# Altium PCB PCB1.PcbDoc (part 1 of 3)
Units mm, origin at the board's own origin, x right, y up, seen from the top; angles counter-clockwise.
Board outline 232.8 x 105.73 mm, 4 copper layers (Top Layer, Power Layer, GND Layer, Bottom Layer), stack 1.714 mm thick; 607 components, 390 nets, 1962 pads, 57 vias.
Unrouted connection lines stored in the file: 1386.
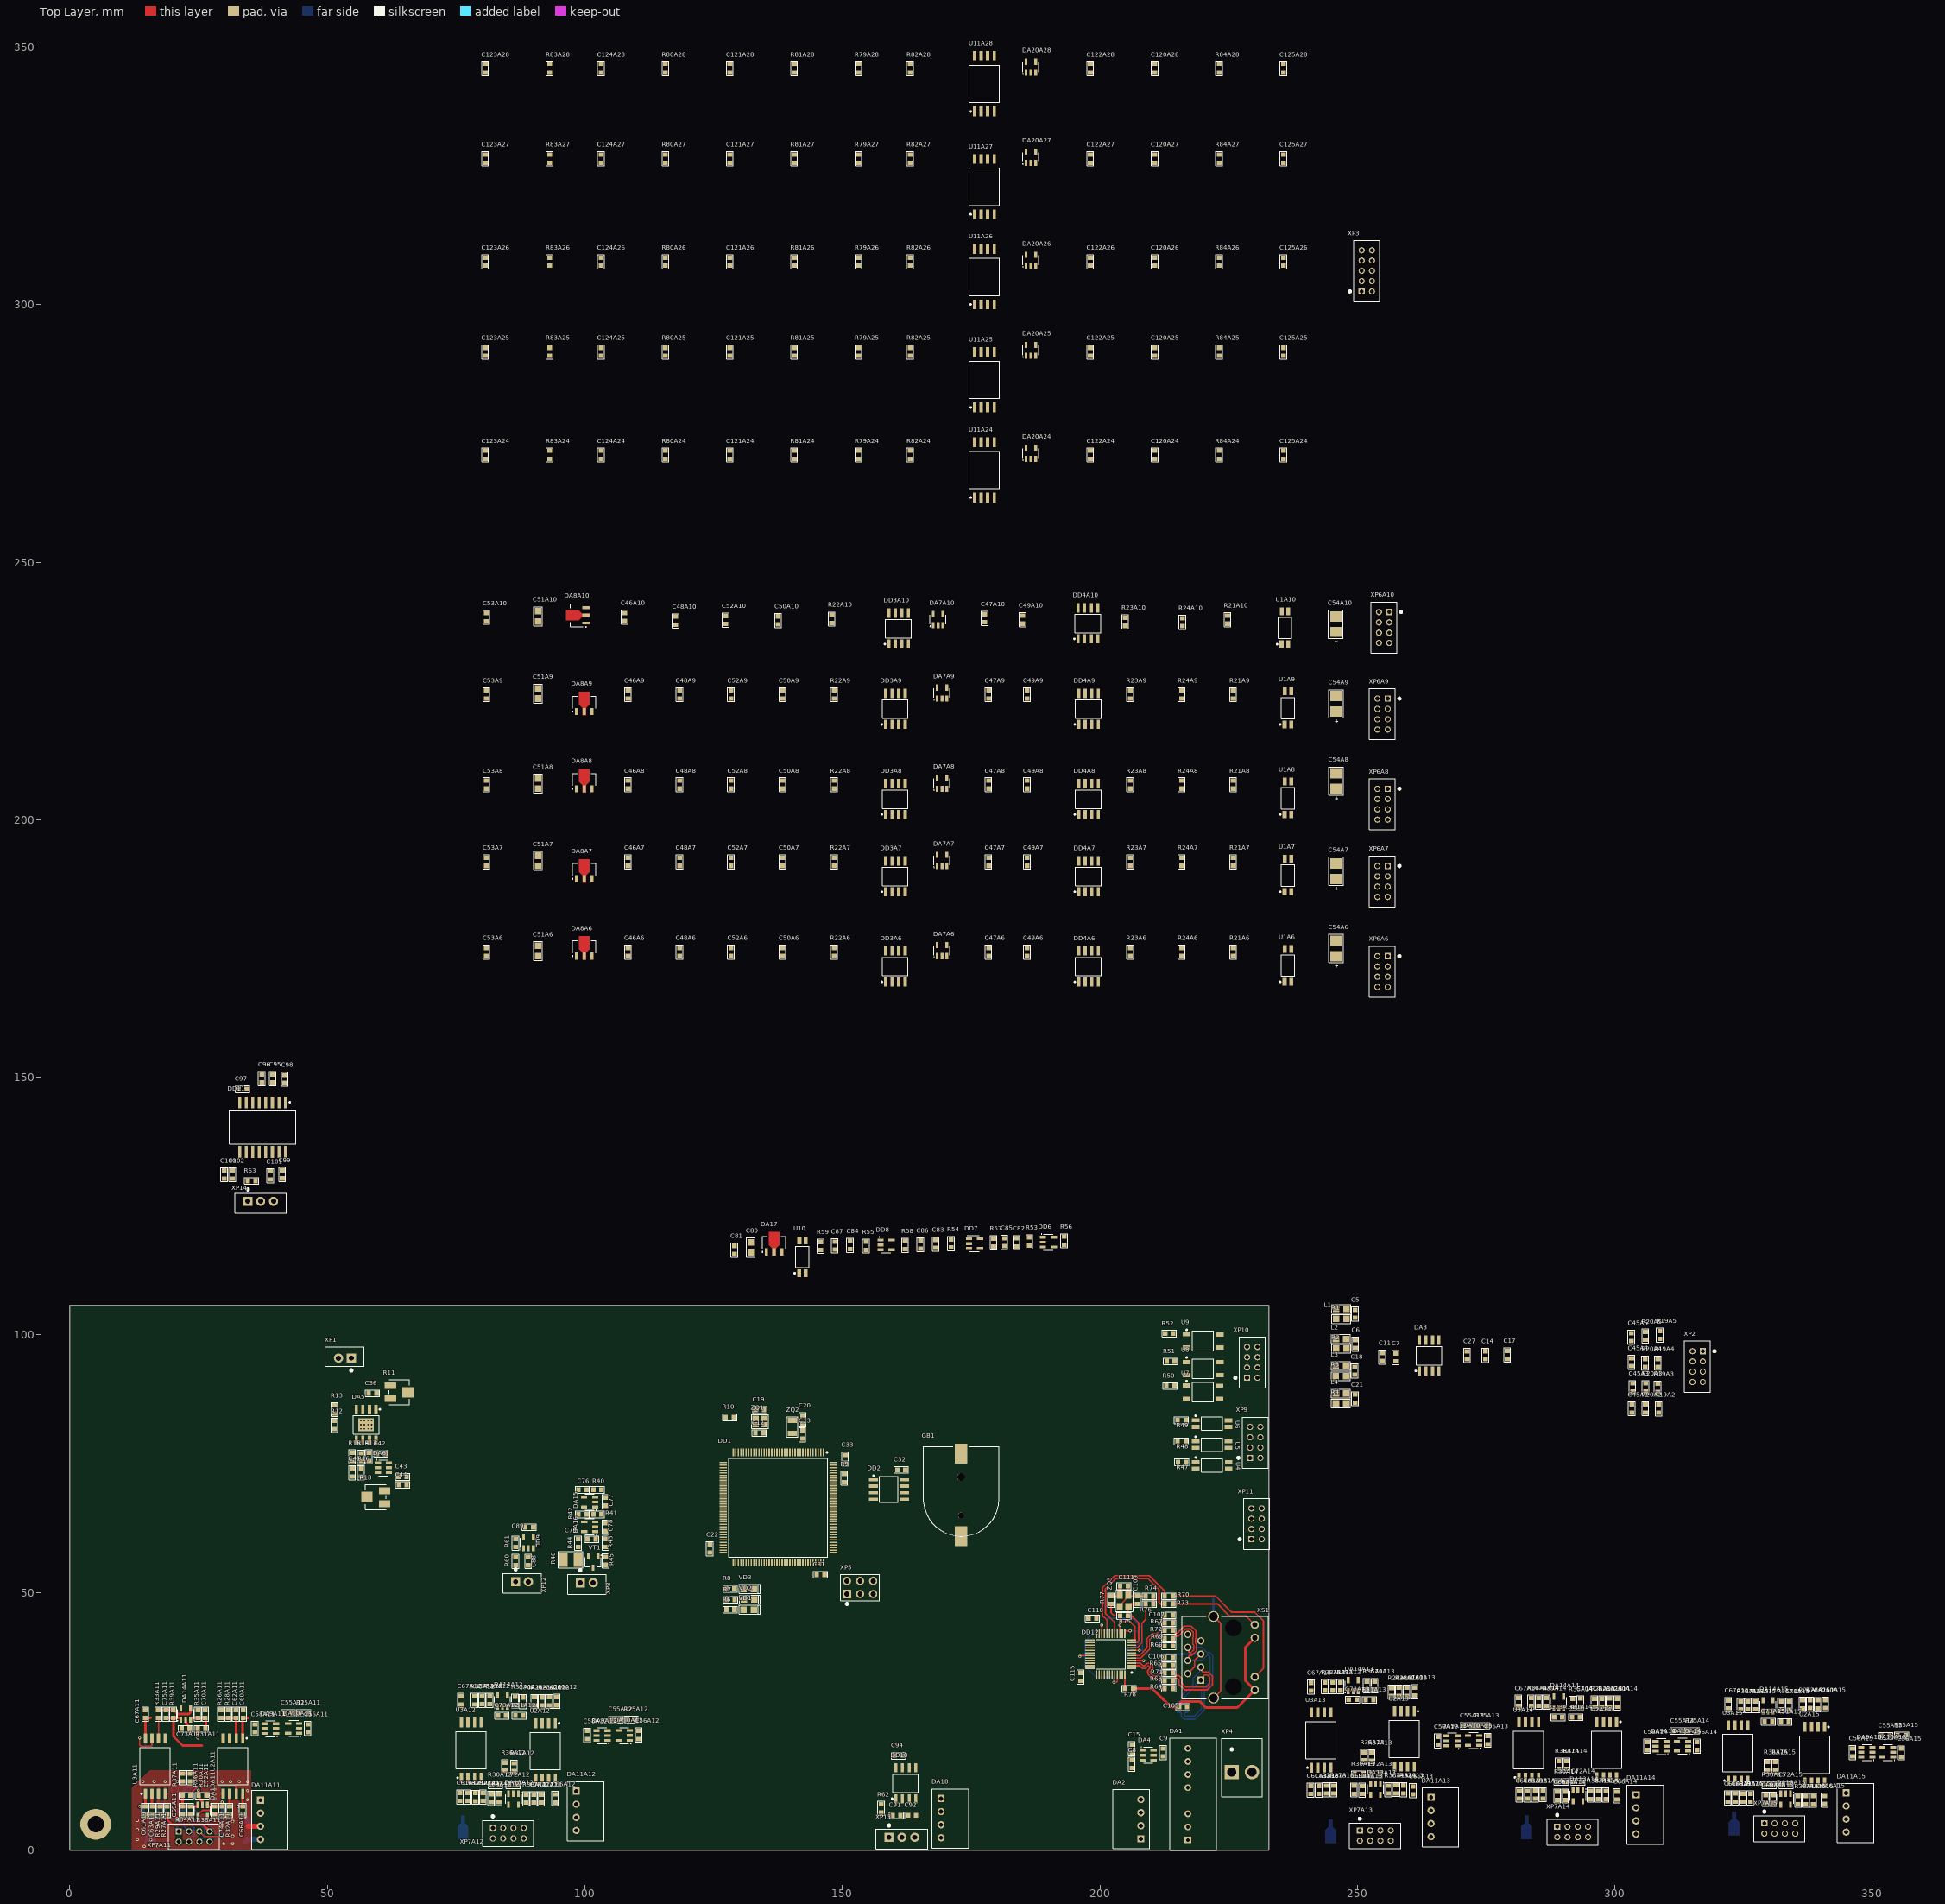
[diagram p0: Top Layer view]
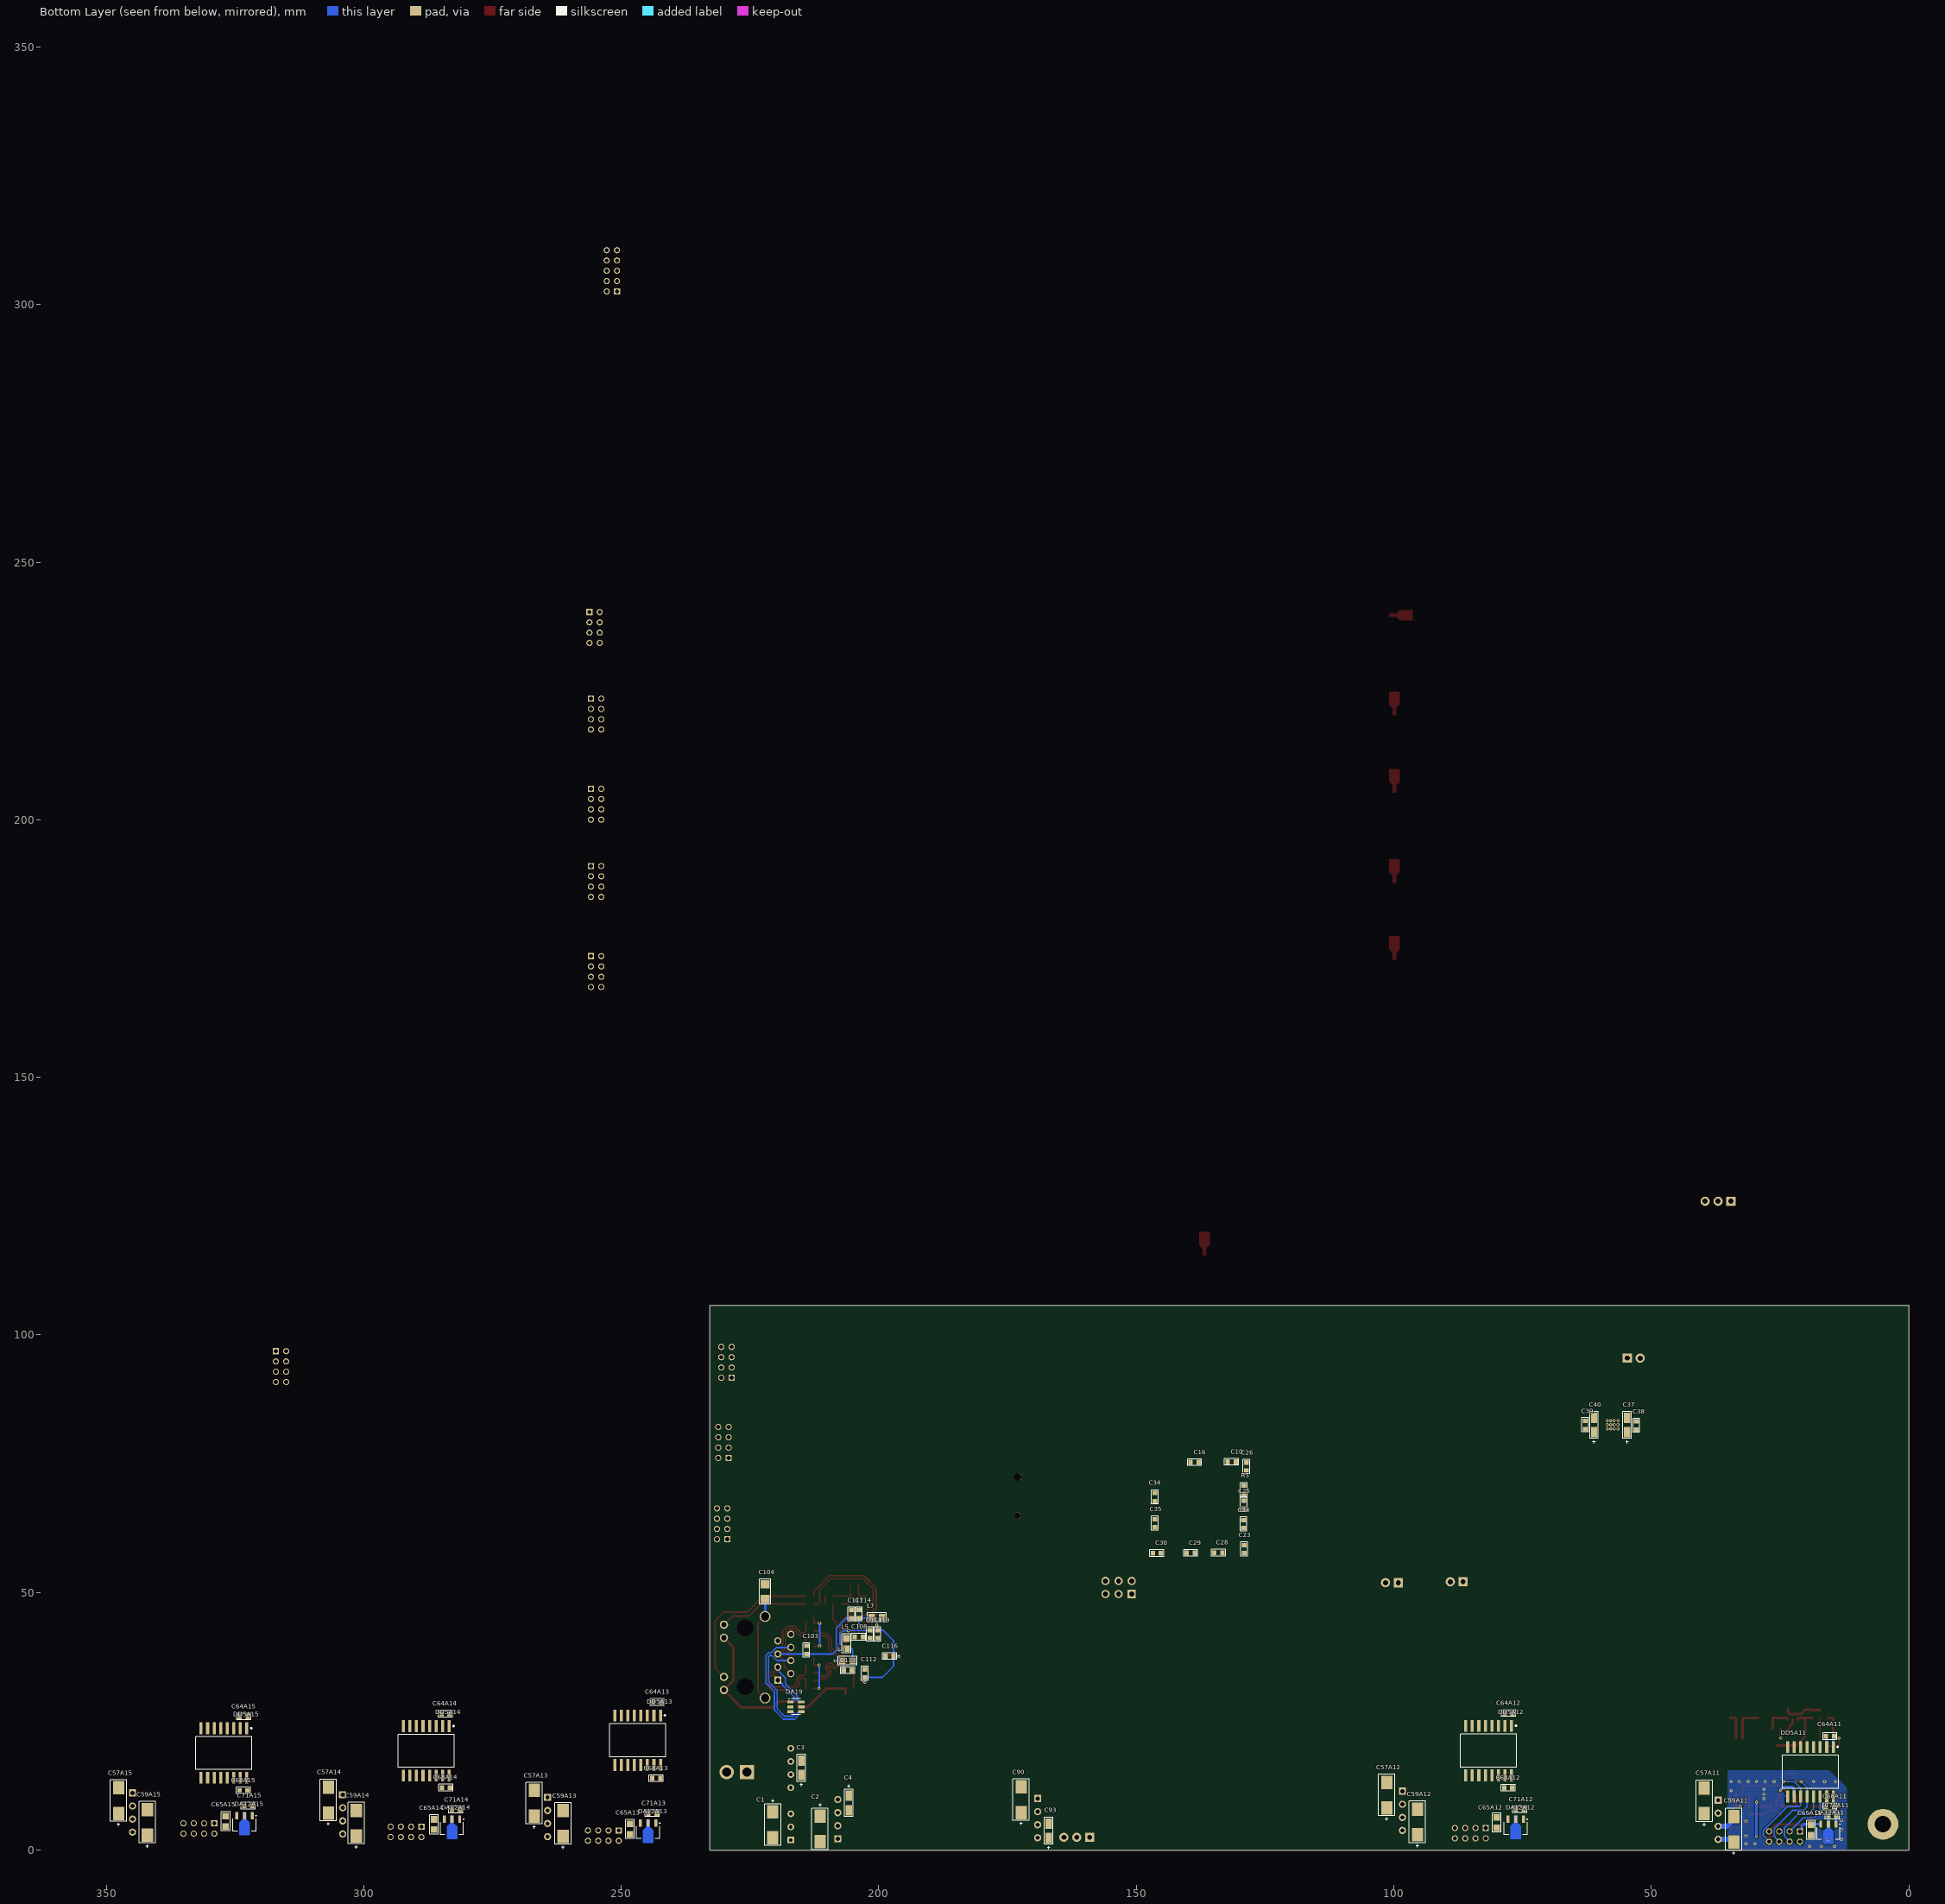
[diagram p1: Bottom Layer view, seen from below]
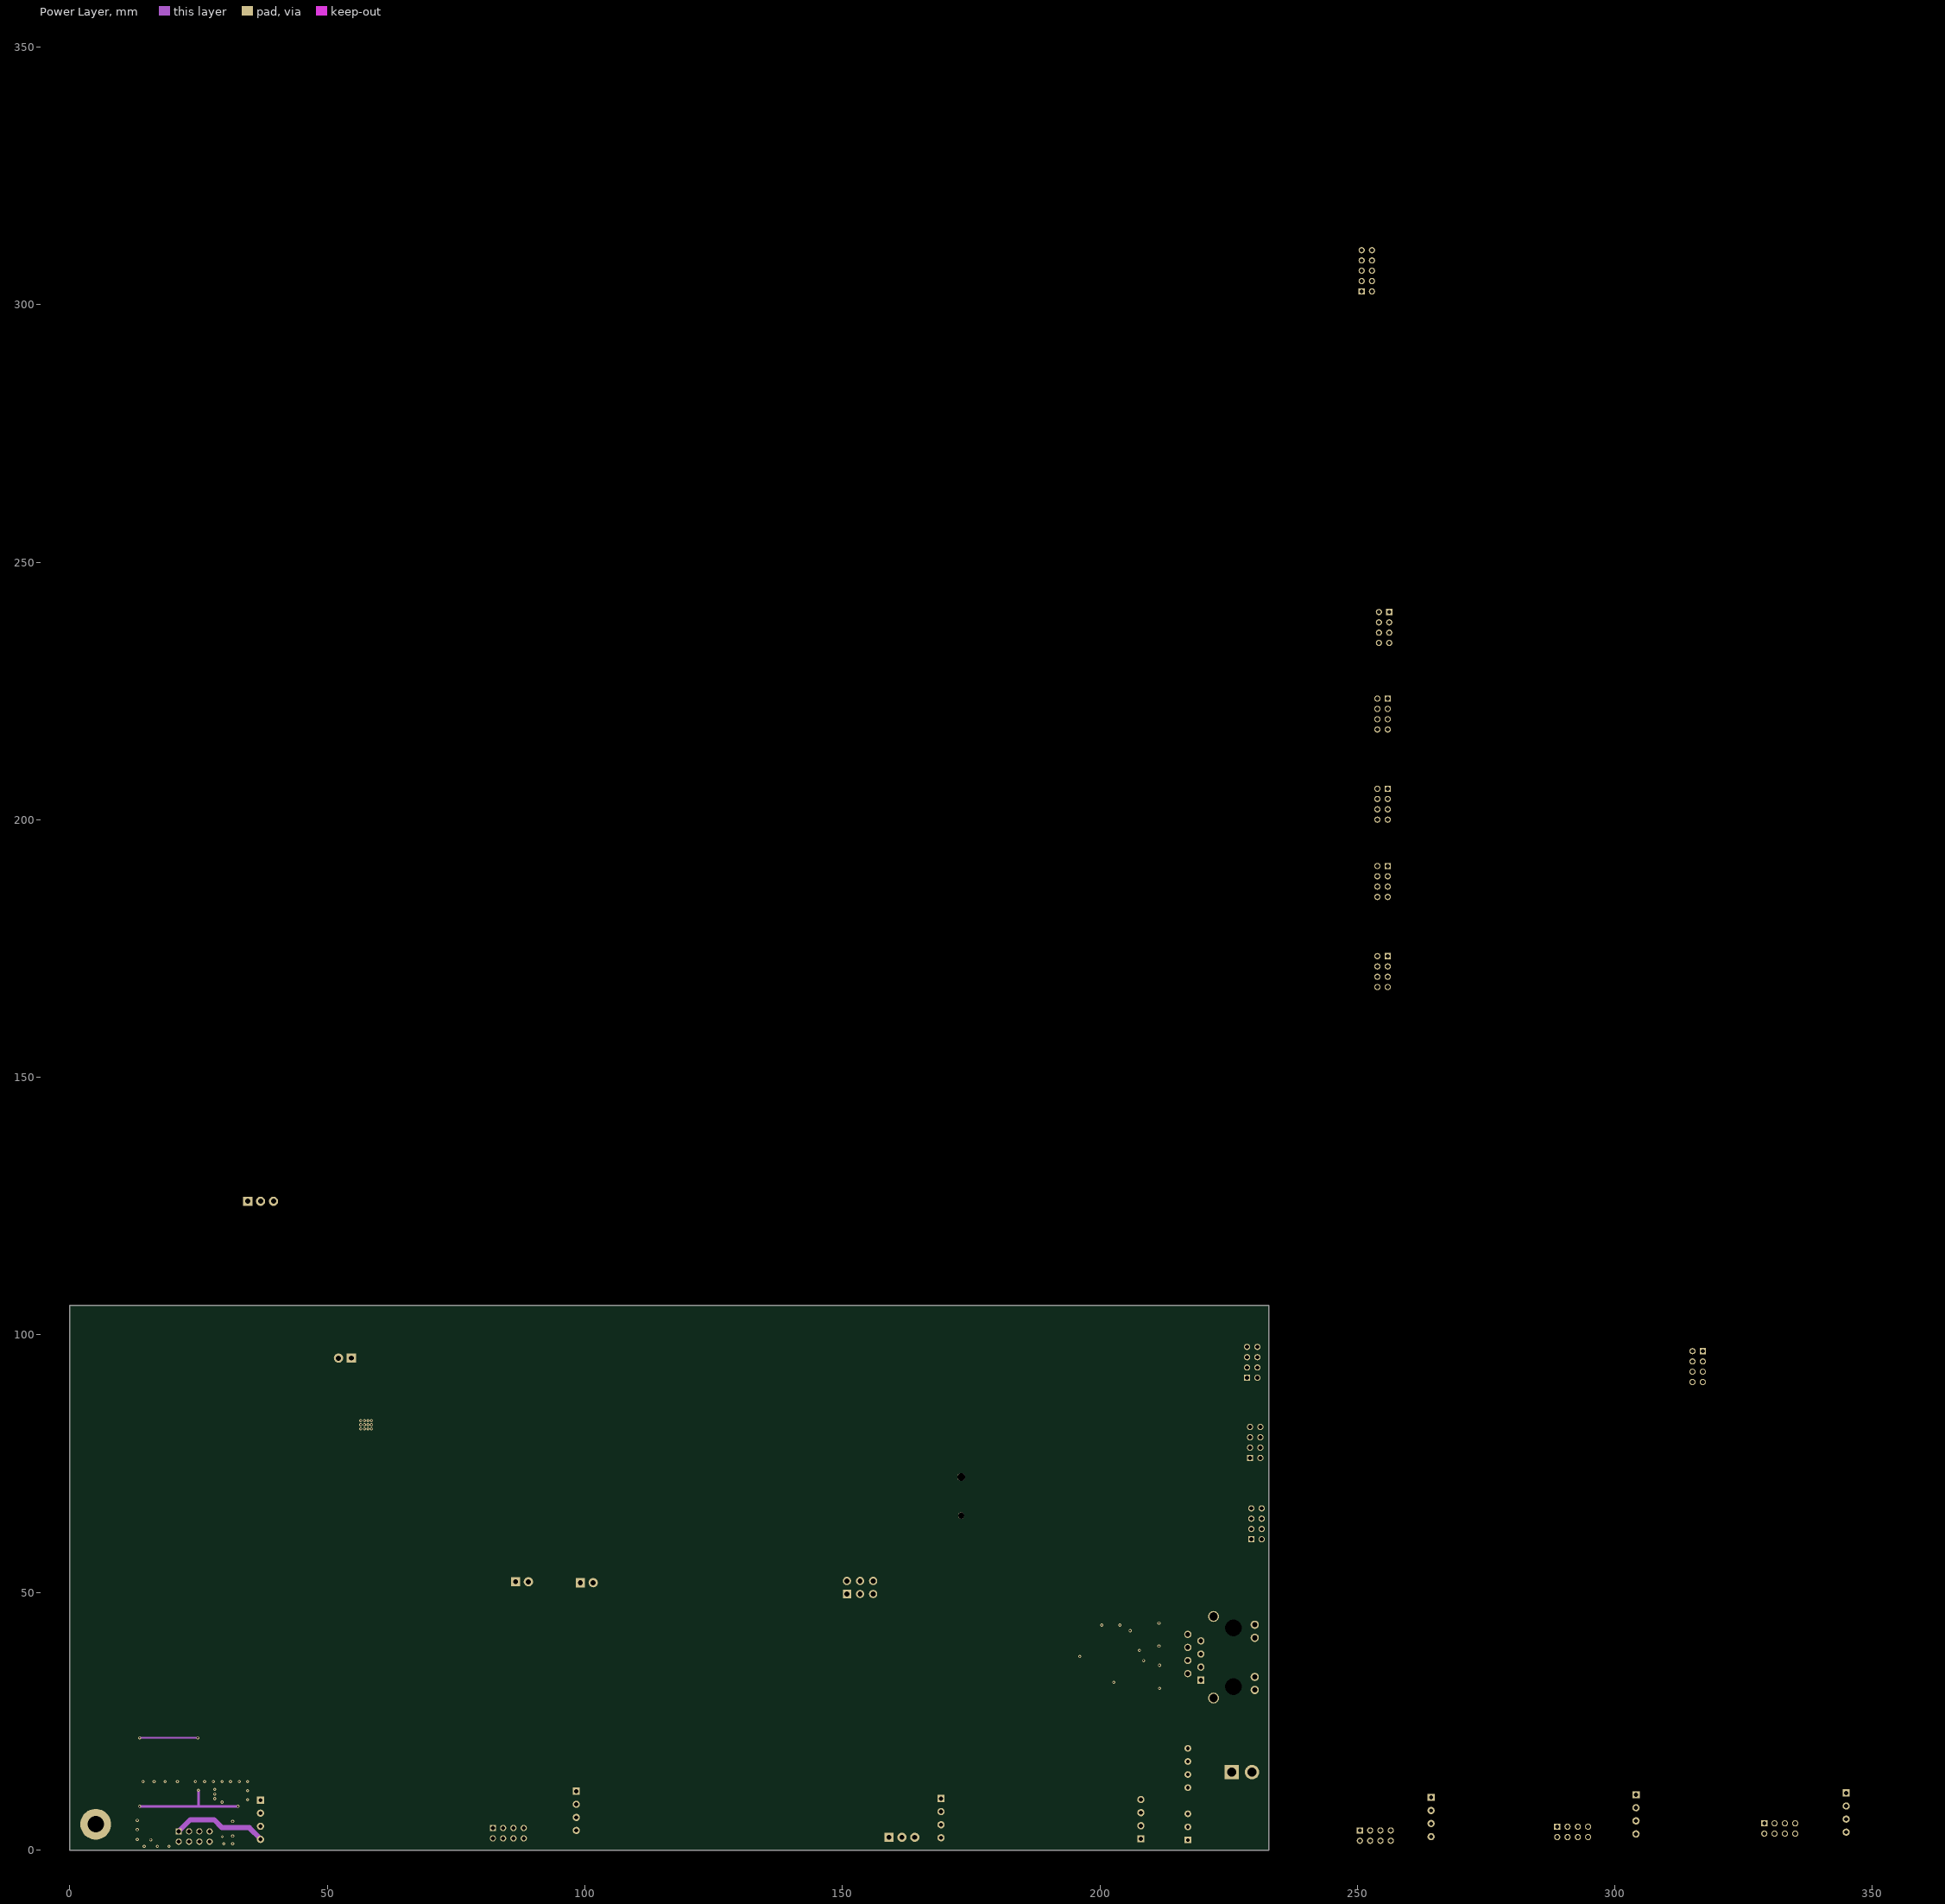
[diagram p2: Power Layer]
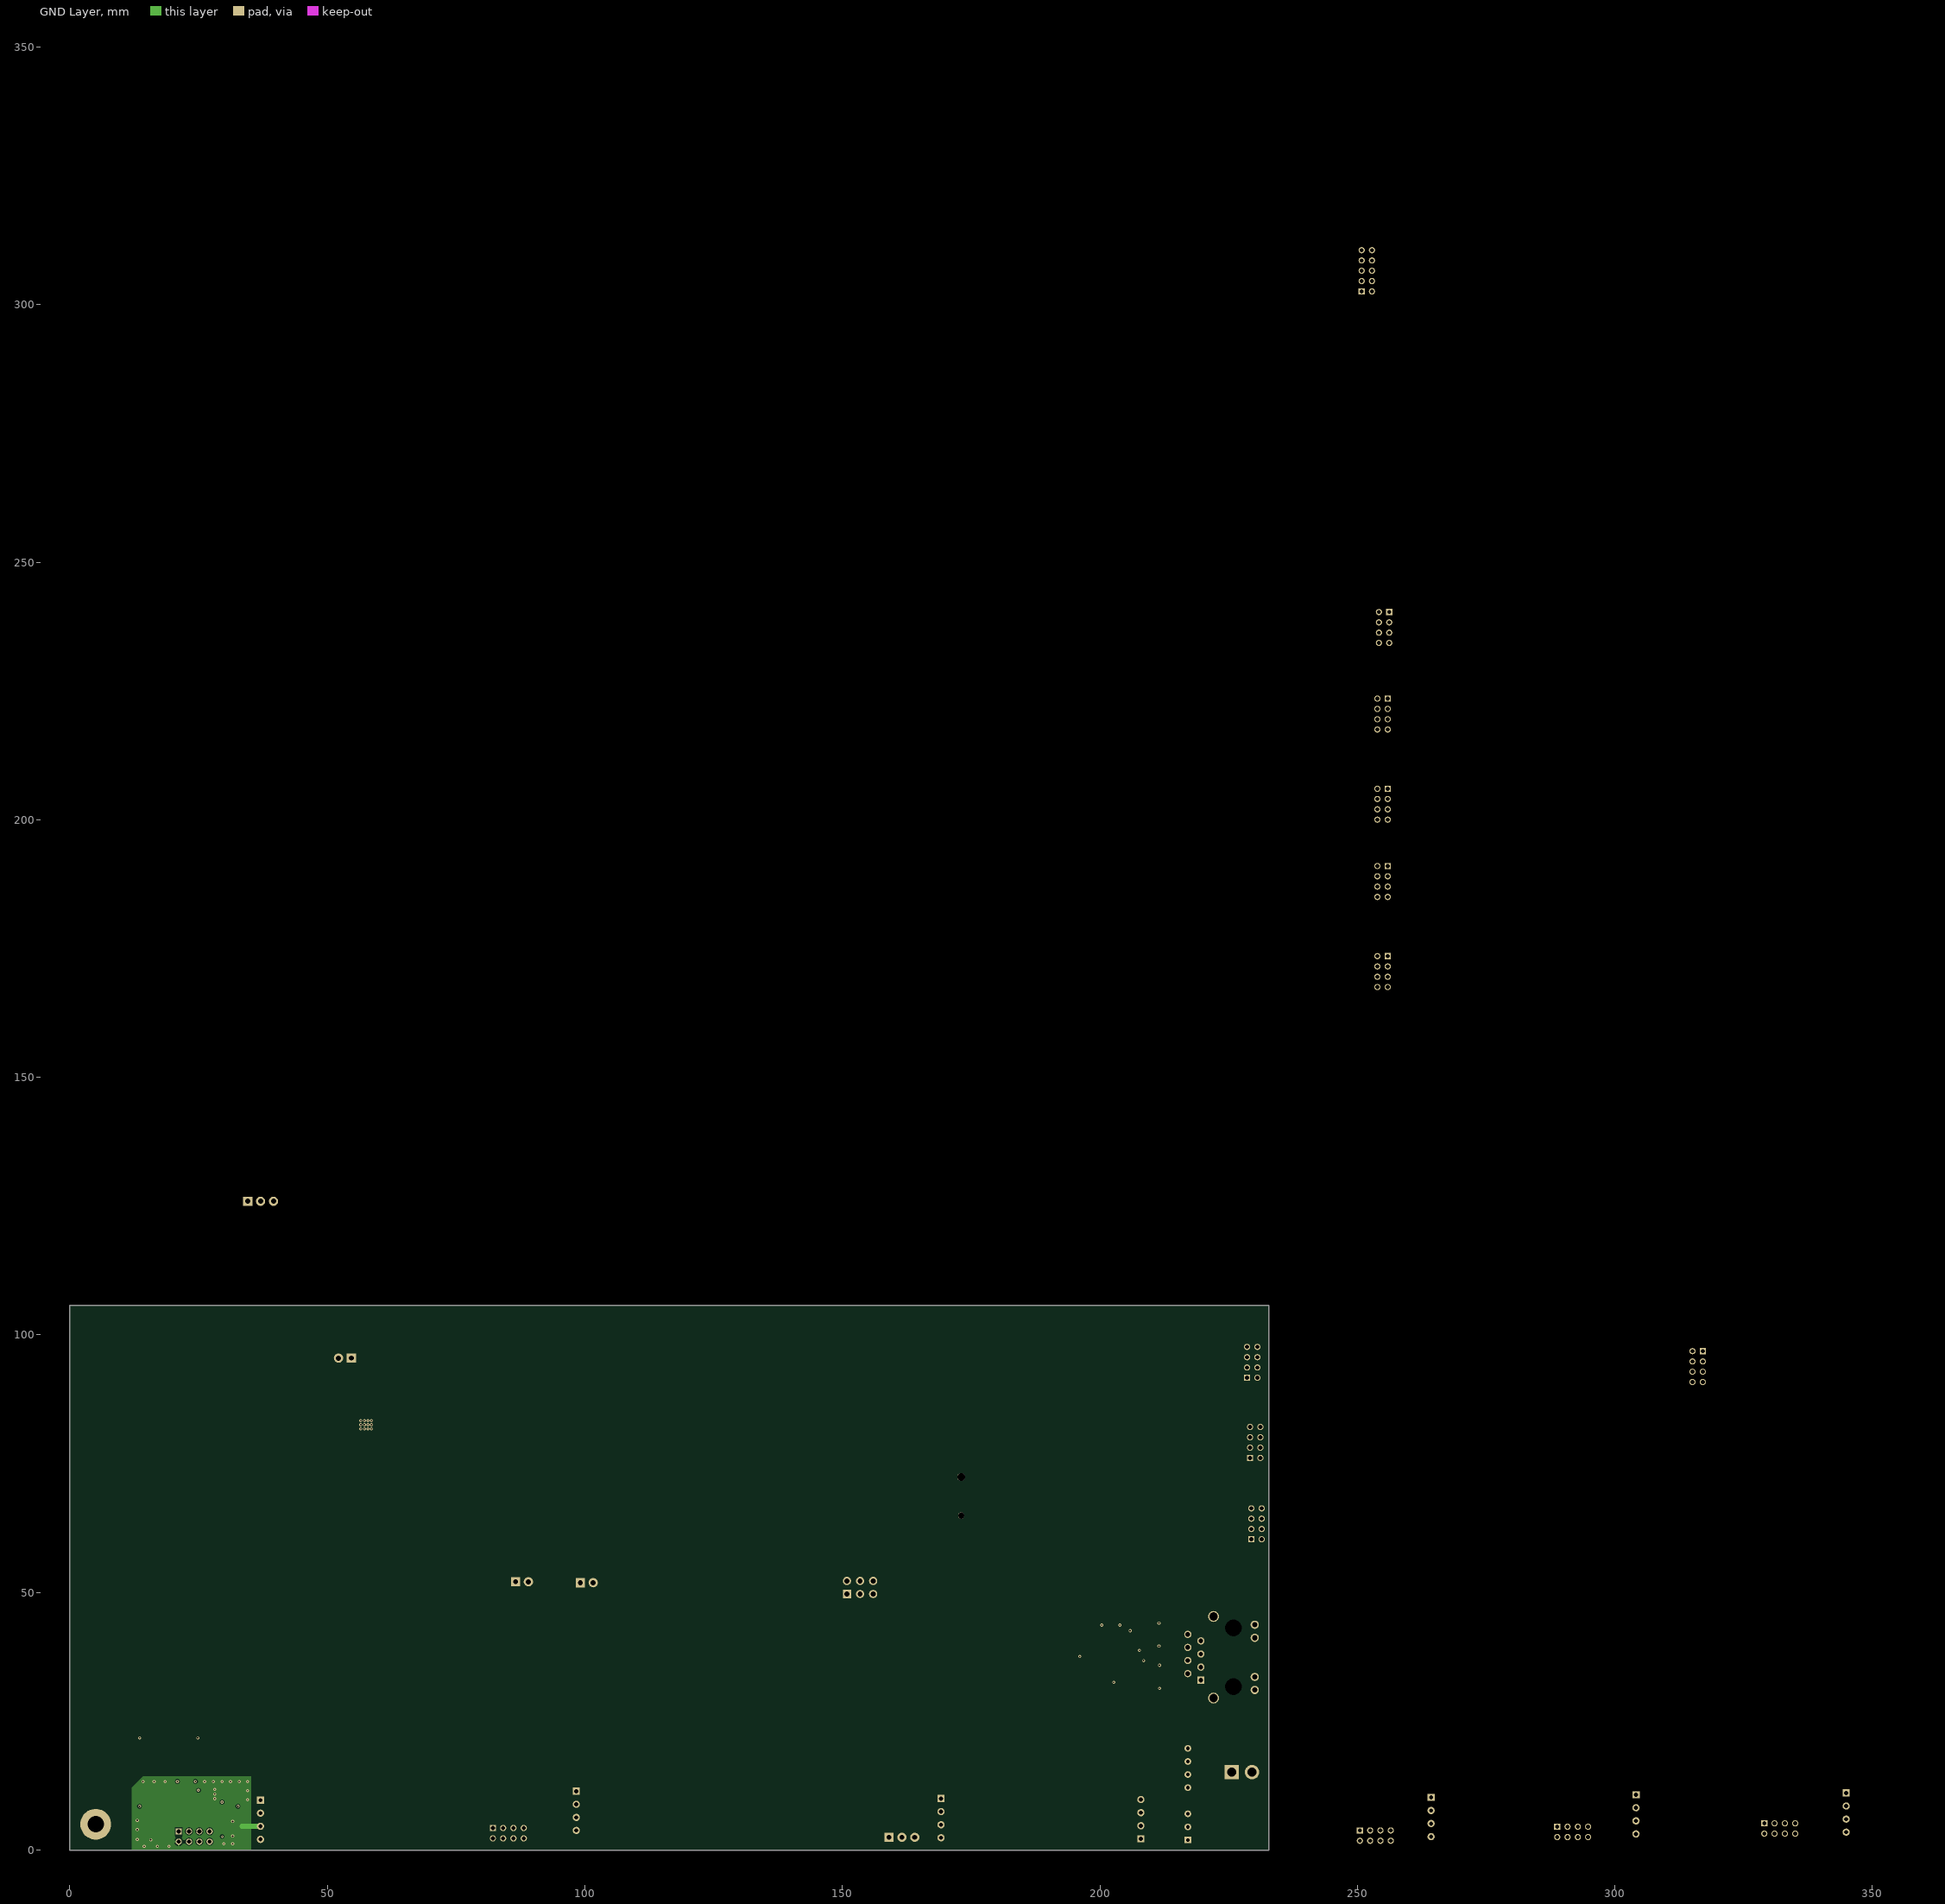
[diagram p3: GND Layer]

## Layer stack, top to bottom
Top Solder: solder mask 0.0102, Solder Resist, Dk 3.5
Top Layer: signal copper 0.018
Dielectric 1: prepreg 0.0711, PP-006, Dk 4.1
Power Layer: signal copper 0.018
Dielectric2: dielectric 1.5, FR-4, Dk 4.8
GND Layer: signal copper 0.018
Dielectric3: prepreg 0.0711, PP-006, Dk 4.1
Bottom Layer: signal copper 0.018
Bottom Solder: solder mask 0.0102, Solder Resist, Dk 3.5

## Board outline
0,0 0,105.725 232.8,105.725 232.8,0

## Design rules (kind name [scope] priority, off if disabled: settings)
BoardOutlineClearance [(OnLayer('Bottom Layer') AND OnLayer('Top Layer'))] p1: gap=0.2 ignorepadtopadclearanceinfootprint=FALSE
Clearance [All] p1: gap=0.15 ignorepadtopadclearanceinfootprint=TRUE
DiffPairsRouting [All] p1: maxlimit=0.254 minlimit=0.2 mostfreqgap=0.254 toplayer_minwidth=0.3 toplayer_maxwidth=0.381 toplayer_prefwidth=0.381 midlayer1_minwidth=0.3 midlayer1_maxwidth=0.381 midlayer1_prefwidth=0.381 midlayer2_minwidth=0.3 midlayer2_maxwidth=0.381 midlayer2_prefwidth=0.381 bottomlayer_minwidth=0.3 bottomlayer_maxwidth=0.381 bottomlayer_prefwidth=0.381 maxuncoupledlength=12.7
Height [(OnLayer('Bottom Layer'))] p1: minheight=0 maxheight=3 prefheight=3
HoleSize [All] p1: absolutevalues=TRUE maxlimit=10 minlimit=0.2 maxpercent=80.000 minpercent=20.000
MinimumSolderMaskSliver [All] p1: minsoldermaskwidth=0.04
PlaneClearance [All] p1: clearance=0.5
PlaneConnect [All] p1: planeconnectstyle=Relief reliefexpansion=0.5 reliefentries=4 reliefconductorwidth=0.25 reliefairgap=0.25
PolygonConnect [All] p1: thpad.connectstyle=Relief thpad.reliefconductorwidth=0.5 thpad.reliefentries=4 thpad.polygonreliefangle="90 Angle" thpad.airgapwidth=0.25 smdpad.connectstyle=Relief smdpad.reliefconductorwidth=0.5 smdpad.reliefentries=4 smdpad.polygonreliefangle="90 Angle" smdpad.airgapwidth=0.25 via.connectstyle=Direct via.reliefconductorwidth=0.254 via.reliefentries=4 via.polygonreliefangle="90 Angle" via.airgapwidth=0.152
RoutingCorners [All] p1: cornerstyle=Round minsetback=0.254 maxsetback=2.54
RoutingVias [All] p1: holewidth=0.2 width=0.5 viastyle="Through Hole" minholewidth=0.2 minwidth=0.5 maxholewidth=1 maxwidth=1
SilkToSilkClearance [All] p1: silktosilkclearance=0.1
SilkToSolderMaskClearance [IsPad] p1: minsilkscreentomaskgap=0 clearancetoexposedcopper=TRUE
SolderMaskExpansion [All] p1: expansion=0.102 istentingtop=FALSE
Width [All] p1: maxlimit=1 minlimit=0.2 preferedwidth=0.3 minimp=50.000000 maximp=50.000000 favimp=50.000000
21 further rules are at their usual default settings.

## Classes and differential pairs
differential pair class TD: TXO
differential pair class RD: RXI
channel class Thermistor: A2 A3 A4 A5
channel class Power_supply: A6 A7 A8 A9 A10
channel class LD_driver: A11 A12 A13 A14 A15
channel class Analog_isolation: A24 A25 A26 A27 A28
component class Main: C1 C2 C3 C4 C5 C6 C7 C8 C9 C10 C11 C12 C13 C14 C15 C16 C17 C18 C19 C20 C21 C22 C23 C24 C25 C26 C27 C28 C29 C30 C31 C32 C33 C34 C35 DA1 DA2 DA3 DA4 DD1 DD2 GB1 L1 L2 L3 L4 R1 R2 R3 R4 R5 R6 R7 R8 R9 R10 VD1 VD2 VD3 XP1 XP2 XP3 XP4 XP5 ZQ1 ZQ2
component class A28: C120A28 C121A28 C122A28 C123A28 C124A28 C125A28 DA20A28 R79A28 R80A28 R81A28 R82A28 R83A28 R84A28 U11A28
component class A27: C120A27 C121A27 C122A27 C123A27 C124A27 C125A27 DA20A27 R79A27 R80A27 R81A27 R82A27 R83A27 R84A27 U11A27
component class A26: C120A26 C121A26 C122A26 C123A26 C124A26 C125A26 DA20A26 R79A26 R80A26 R81A26 R82A26 R83A26 R84A26 U11A26
component class A25: C120A25 C121A25 C122A25 C123A25 C124A25 C125A25 DA20A25 R79A25 R80A25 R81A25 R82A25 R83A25 R84A25 U11A25
component class A24: C120A24 C121A24 C122A24 C123A24 C124A24 C125A24 DA20A24 R79A24 R80A24 R81A24 R82A24 R83A24 R84A24 U11A24
component class A23: C103 C104 C105 C106 C107 C108 C109 C110 C111 C112 C113 C114 C115 C116 C117 C118 C119 DA19 DD12 L5 L6 L7 R64 R65 R66 R67 R68 R69 R70 R71 R72 R73 R74 R75 R76 R77 R78 XS1 ZQ3
component class A22: C95 C96 C97 C98 C99 C100 C101 C102 DD11 R63 XP14
component class A21: C90 C91 C92 C93 C94 DA18 DD10 R62 XP13
component class A20: C88 C89 DD9 R60 R61 XP12
component class A19: C80 C81 C82 C83 C84 C85 C86 C87 DA17 DD6 DD7 DD8 R53 R54 R55 R56 R57 R58 R59 U10 XP11
component class A18: R50 R51 R52 U7 U8 U9 XP10
component class A17: R47 R48 R49 U4 U5 U6 XP9
component class A16: C76 C77 C78 C79 DA15 DA16 R40 R41 R42 R43 R44 R45 R46 VT1 XP8
component class A15: C55A15 C56A15 C57A15 C58A15 C59A15 C60A15 C61A15 C62A15 C63A15 C64A15 C65A15 C66A15 C67A15 C68A15 C69A15 C70A15 C71A15 C72A15 C73A15 C74A15 C75A15 DA9A15 DA10A15 DA11A15 DA12A15 DA13A15 DA14A15 DD5A15 R25A15 R26A15 R27A15 R28A15 R29A15 R30A15 R31A15 R32A15 R33A15 R34A15 R35A15 R36A15 R37A15 R38A15 R39A15 U2A15 U3A15 XP7A15
component class A14: C55A14 C56A14 C57A14 C58A14 C59A14 C60A14 C61A14 C62A14 C63A14 C64A14 C65A14 C66A14 C67A14 C68A14 C69A14 C70A14 C71A14 C72A14 C73A14 C74A14 C75A14 DA9A14 DA10A14 DA11A14 DA12A14 DA13A14 DA14A14 DD5A14 R25A14 R26A14 R27A14 R28A14 R29A14 R30A14 R31A14 R32A14 R33A14 R34A14 R35A14 R36A14 R37A14 R38A14 R39A14 U2A14 U3A14 XP7A14
component class A13: C55A13 C56A13 C57A13 C58A13 C59A13 C60A13 C61A13 C62A13 C63A13 C64A13 C65A13 C66A13 C67A13 C68A13 C69A13 C70A13 C71A13 C72A13 C73A13 C74A13 C75A13 DA9A13 DA10A13 DA11A13 DA12A13 DA13A13 DA14A13 DD5A13 R25A13 R26A13 R27A13 R28A13 R29A13 R30A13 R31A13 R32A13 R33A13 R34A13 R35A13 R36A13 R37A13 R38A13 R39A13 U2A13 U3A13 XP7A13
component class A12: C55A12 C56A12 C57A12 C58A12 C59A12 C60A12 C61A12 C62A12 C63A12 C64A12 C65A12 C66A12 C67A12 C68A12 C69A12 C70A12 C71A12 C72A12 C73A12 C74A12 C75A12 DA9A12 DA10A12 DA11A12 DA12A12 DA13A12 DA14A12 DD5A12 R25A12 R26A12 R27A12 R28A12 R29A12 R30A12 R31A12 R32A12 R33A12 R34A12 R35A12 R36A12 R37A12 R38A12 R39A12 U2A12 U3A12 XP7A12
component class A11: C55A11 C56A11 C57A11 C58A11 C59A11 C60A11 C61A11 C62A11 C63A11 C64A11 C65A11 C66A11 C67A11 C68A11 C69A11 C70A11 C71A11 C72A11 C73A11 C74A11 C75A11 DA9A11 DA10A11 DA11A11 DA12A11 DA13A11 DA14A11 DD5A11 R25A11 R26A11 R27A11 R28A11 R29A11 R30A11 R31A11 R32A11 R33A11 R34A11 R35A11 R36A11 R37A11 R38A11 R39A11 U2A11 U3A11 XP7A11
component class A10: C46A10 C47A10 C48A10 C49A10 C50A10 C51A10 C52A10 C53A10 C54A10 DA7A10 DA8A10 DD3A10 DD4A10 R21A10 R22A10 R23A10 R24A10 U1A10 XP6A10
component class A9: C46A9 C47A9 C48A9 C49A9 C50A9 C51A9 C52A9 C53A9 C54A9 DA7A9 DA8A9 DD3A9 DD4A9 R21A9 R22A9 R23A9 R24A9 U1A9 XP6A9
component class A8: C46A8 C47A8 C48A8 C49A8 C50A8 C51A8 C52A8 C53A8 C54A8 DA7A8 DA8A8 DD3A8 DD4A8 R21A8 R22A8 R23A8 R24A8 U1A8 XP6A8
component class A7: C46A7 C47A7 C48A7 C49A7 C50A7 C51A7 C52A7 C53A7 C54A7 DA7A7 DA8A7 DD3A7 DD4A7 R21A7 R22A7 R23A7 R24A7 U1A7 XP6A7
component class A6: C46A6 C47A6 C48A6 C49A6 C50A6 C51A6 C52A6 C53A6 C54A6 DA7A6 DA8A6 DD3A6 DD4A6 R21A6 R22A6 R23A6 R24A6 U1A6 XP6A6
component class A5: C45A5 R19A5 R20A5
component class A4: C45A4 R19A4 R20A4
component class A3: C45A3 R19A3 R20A3
component class A2: C45A2 R19A2 R20A2
component class A1: C36 C37 C38 C39 C40 C41 C42 C43 C44 DA5 DA6 R11 R12 R13 R14 R15 R16 R17 R18
differential pair TXO: +TXO_P -TXO_N
differential pair TD: +TD_P -TD_N
differential pair RXI: +RXI_P -RXI_N
differential pair RD: +RD_P -RD_N

## Components (designator, comment, footprint, x,y, rotation, side; value= is the part's Value field where it differs from the comment)
C1 "10мкФх35B" CAP_C 220.6,7.425 r270 bottom
C2 "10мкФх35B" CAP_C 211.4,6.6 r270 bottom
C3 "10мкФх10B" CAP_A 215.025,14.55 r90 bottom
C4 "10мкФх10B" CAP_A 205.8,10.525 r270 bottom
C5 "0,1мкФ" CAP_0603 249.575,104.9 r270 top
C6 "0,1мкФ" CAP_0603 249.6,99.025 r270 top
C7 "0,1мкФ" CAP_0603 257.425,94.825 r90 top
C8 "10мкФ" CAP_0603 206.2,15.875 r90 top
C9 "1мкФ" CAP_0603 212.275,18.15 r90 top
C10 "0,1мкФ" CAP_0603 132.275,75.35 r180 bottom
C11 "10мкФ" CAP_0603 254.85,96.5 r270 top
C12 "8пФ" CAP_0603 133.075,80.975 r0 top
C13 "18пФ" CAP_0603 142.25,79.85 r90 top
C14 "0,1мкФ" CAP_0603 274.875,95.275 r90 top
C15 "10мкФ" CAP_0603 206.2,20.475 r270 top
C16 "0,1мкФ" CAP_0603 139.475,75.275 r180 bottom
C17 "0,1мкФ" CAP_0603 279.1,95.3 r90 top
C18 "0,1мкФ" CAP_0603 249.475,93.825 r270 top
C19 "8пФ" CAP_0603 134.8,85.45 r180 top
C20 "18пФ" CAP_0603 142.275,84.375 r270 top
C21 "0,1мкФ" CAP_0603 249.575,88.425 r270 top
C22 "2,2мкФ" CAP_0603 124.275,59.325 r270 top
C23 "0,1мкФ" CAP_0603 129.05,59.225 r270 bottom
C24 "0,1мкФ" CAP_0603 129.15,62.475 r90 bottom
C25 "0,1мкФ" CAP_0603 129.125,66.225 r90 bottom
C26 "0,1мкФ" CAP_0603 128.6,73.65 r90 bottom
C27 "0,1мкФ" CAP_0603 271.3,95.25 r90 top
C28 "0,1мкФ" CAP_0603 133.25,57.7 r0 bottom
C29 "0,1мкФ" CAP_0603 138.625,57.675 r0 bottom
C30 "0,1мкФ" CAP_0603 145.2,57.625 r0 bottom
C31 "2,2мкФ" CAP_0603 144.975,53.475 r0 top
C32 "0,1мкФ" CAP_0603 162.25,73.825 r180 top
C33 "0,1мкФ" CAP_0603 150.525,75.125 r90 top
C34 "0,1мкФ" CAP_0603 146.4,69.325 r270 bottom
C35 "0,1мкФ" CAP_0603 146.375,64.25 r270 bottom
C36 "22пФ" CAP_0603 59.575,88.675 r180 top
C37 "10мкФх10B" CAP_A 54.686,81.1 r90 bottom
C38 "0,1мкФ" CAP_0603 52.9,83.225 r270 bottom
C39 "0,1мкФ" CAP_0603 62.825,81.725 r90 bottom
C40 "10мкФх10B" CAP_A 61.111,81.1 r90 bottom
C41 "0,1мкФ" CAP_0603 54.825,72.475 r90 top
C42 "22пФ" CAP_0603 59.65,76.95 r0 top
C43 "0,1мкФ" CAP_0603 63.8,72.45 r0 top
C44 "2,2мкФ" CAP_0603 63.825,70.9 r0 top
C45A2 "0,1мкФ" CAP_0603 303.275,84.9 r90 top (schematic designator C45)
C45A3 "0,1мкФ" CAP_0603 303.425,89 r90 top (schematic designator C45)
C45A4 "0,1мкФ" CAP_0603 303.225,93.9 r90 top (schematic designator C45)
C45A5 "0,1мкФ" CAP_0603 303.2,98.775 r90 top (schematic designator C45)
C46A6 "0,1мкФ" CAP_0603 108.375,173.525 r90 top (schematic designator C46)
C46A7 "0,1мкФ" CAP_0603 108.375,191.025 r90 top (schematic designator C46)
C46A8 "0,1мкФ" CAP_0603 108.375,206.025 r90 top (schematic designator C46)
C46A9 "0,1мкФ" CAP_0603 108.375,223.525 r90 top (schematic designator C46)
C46A10 "0,1мкФ" CAP_0603 107.75,238.55 r90 top (schematic designator C46)
C47A6 "0,1мкФ" CAP_0603 178.375,173.525 r90 top (schematic designator C47)
C47A7 "0,1мкФ" CAP_0603 178.375,191.025 r90 top (schematic designator C47)
C47A8 "0,1мкФ" CAP_0603 178.375,206.025 r90 top (schematic designator C47)
C47A9 "0,1мкФ" CAP_0603 178.375,223.525 r90 top (schematic designator C47)
C47A10 "0,1мкФ" CAP_0603 177.625,238.325 r90 top (schematic designator C47)
C48A6 "0,1мкФ" CAP_0603 118.375,173.525 r90 top (schematic designator C48)
C48A7 "0,1мкФ" CAP_0603 118.375,191.025 r90 top (schematic designator C48)
C48A8 "0,1мкФ" CAP_0603 118.375,206.025 r90 top (schematic designator C48)
C48A9 "0,1мкФ" CAP_0603 118.375,223.525 r90 top (schematic designator C48)
C48A10 "0,1мкФ" CAP_0603 117.65,237.85 r90 top (schematic designator C48)
C49A6 "0,1мкФ" CAP_0603 185.875,173.525 r90 top (schematic designator C49)
C49A7 "0,1мкФ" CAP_0603 185.875,191.025 r90 top (schematic designator C49)
C49A8 "0,1мкФ" CAP_0603 185.875,206.025 r90 top (schematic designator C49)
C49A9 "0,1мкФ" CAP_0603 185.875,223.525 r90 top (schematic designator C49)
C49A10 "0,1мкФ" CAP_0603 185,238.05 r90 top (schematic designator C49)
C50A6 "1мкФ" CAP_0603 138.375,173.525 r90 top (schematic designator C50)
C50A7 "1мкФ" CAP_0603 138.375,191.025 r90 top (schematic designator C50)
C50A8 "1мкФ" CAP_0603 138.375,206.025 r90 top (schematic designator C50)
C50A9 "1мкФ" CAP_0603 138.375,223.525 r90 top (schematic designator C50)
C50A10 "1мкФ" CAP_0603 137.525,237.925 r90 top (schematic designator C50)
C51A6 "0,33мкФ" CAP_0805 90.875,173.525 r90 top (schematic designator C51)
C51A7 "0,33мкФ" CAP_0805 90.875,191.025 r90 top (schematic designator C51)
C51A8 "0,33мкФ" CAP_0805 90.875,206.025 r90 top (schematic designator C51)
C51A9 "0,33мкФ" CAP_0805 90.875,223.525 r90 top (schematic designator C51)
C51A10 "0,33мкФ" CAP_0805 90.875,238.525 r90 top (schematic designator C51)
C52A6 "0,1мкФ" CAP_0603 128.375,173.525 r90 top (schematic designator C52)
C52A7 "0,1мкФ" CAP_0603 128.375,191.025 r90 top (schematic designator C52)
C52A8 "0,1мкФ" CAP_0603 128.375,206.025 r90 top (schematic designator C52)
C52A9 "0,1мкФ" CAP_0603 128.375,223.525 r90 top (schematic designator C52)
C52A10 "0,1мкФ" CAP_0603 127.35,237.975 r90 top (schematic designator C52)
C53A6 "0,1мкФ" CAP_0603 80.875,173.525 r90 top (schematic designator C53)
C53A7 "0,1мкФ" CAP_0603 80.875,191.025 r90 top (schematic designator C53)
C53A8 "0,1мкФ" CAP_0603 80.875,206.025 r90 top (schematic designator C53)
C53A9 "0,1мкФ" CAP_0603 80.875,223.525 r90 top (schematic designator C53)
C53A10 "0,1мкФ" CAP_0603 80.875,238.525 r90 top (schematic designator C53)
C54A6 "10мкФх25B" CAP_B 245.875,173.525 r90 top (schematic designator C54)
C54A7 "10мкФх25B" CAP_B 245.875,188.525 r90 top (schematic designator C54)
C54A8 "10мкФх25B" CAP_B 245.875,206.025 r90 top (schematic designator C54)
C54A9 "10мкФх25B" CAP_B 245.875,221.025 r90 top (schematic designator C54)
C54A10 "10мкФх25B" CAP_B 245.8,236.475 r90 top (schematic designator C54)
C55A11 "10нФ" CAP_0603 43.2,26.6 r180 top (schematic designator C55)
C55A12 "10нФ" CAP_0603 106.825,25.325 r180 top (schematic designator C55)
C55A13 "10нФ" CAP_0603 272.2,24.15 r180 top (schematic designator C55)
C55A14 "10нФ" CAP_0603 312.975,23.125 r180 top (schematic designator C55)
C55A15 "10нФ" CAP_0603 353.375,22.175 r180 top (schematic designator C55)
C56A11 "0,1мкФ" CAP_0603 46.2,24.45 r270 top (schematic designator C56)
C56A12 "0,1мкФ" CAP_0603 110.475,23.15 r270 top (schematic designator C56)
C56A13 "0,1мкФ" CAP_0603 275.325,22.125 r270 top (schematic designator C56)
C56A14 "0,1мкФ" CAP_0603 315.95,20.975 r270 top (schematic designator C56)
C56A15 "0,1мкФ" CAP_0603 355.6,19.7 r270 top (schematic designator C56)
C57A11 "10мкФх35B" CAP_C 39.7,7.05 r90 bottom (schematic designator C57)
C57A12 "10мкФх35B" CAP_C 101.35,8.15 r90 bottom (schematic designator C57)
C57A13 "10мкФх35B" CAP_C 266.875,6.575 r90 bottom (schematic designator C57)
C57A14 "10мкФх35B" CAP_C 306.865,7.2 r90 bottom (schematic designator C57)
C57A15 "10мкФх35B" CAP_C 347.6,7.075 r90 bottom (schematic designator C57)
C58A11 "0,1мкФ" CAP_0603 35.925,24.425 r270 top (schematic designator C58)
C58A12 "0,1мкФ" CAP_0603 100.45,23.125 r270 top (schematic designator C58)
C58A13 "0,1мкФ" CAP_0603 265.625,22.025 r270 top (schematic designator C58)
C58A14 "0,1мкФ" CAP_0603 306.25,20.975 r270 top (schematic designator C58)
C58A15 "0,1мкФ" CAP_0603 346.15,19.75 r270 top (schematic designator C58)
C59A11 "10мкФх25B" CAP_C 33.975,1.525 r90 bottom (schematic designator C59)
C59A12 "10мкФх25B" CAP_C 95.375,2.95 r90 bottom (schematic designator C59)
C59A13 "10мкФх25B" CAP_C 261.3,2.65 r90 bottom (schematic designator C59)
C59A14 "10мкФх25B" CAP_C 301.44,2.7 r90 bottom (schematic designator C59)
C59A15 "10мкФх25B" CAP_C 342,2.875 r90 bottom (schematic designator C59)
C60A11 "0,1мкФ" CAP_0603 33.675,25.625 r90 top (schematic designator C60)
C60A12 "0,1мкФ" CAP_0603 94.55,28.1 r90 top (schematic designator C60)
C60A13 "0,1мкФ" CAP_0603 261.15,29.95 r90 top (schematic designator C60)
C60A14 "0,1мкФ" CAP_0603 300.475,27.8 r90 top (schematic designator C60)
C60A15 "0,1мкФ" CAP_0603 340.875,27.525 r90 top (schematic designator C60)
C61A11 "0,1мкФ" CAP_0603 14.575,8.5 r270 top (schematic designator C61)
C61A12 "0,1мкФ" CAP_0603 75.75,11.125 r270 top (schematic designator C61)
C61A13 "0,1мкФ" CAP_0603 240.925,12.475 r270 top (schematic designator C61)
C61A14 "0,1мкФ" CAP_0603 281.45,11.525 r270 top (schematic designator C61)
C61A15 "0,1мкФ" CAP_0603 321.925,10.975 r270 top (schematic designator C61)
C62A11 "100пФ" CAP_0603 32.225,27.225 r270 top (schematic designator C62)
C62A12 "100пФ" CAP_0603 93.075,29.675 r270 top (schematic designator C62)
C62A13 "100пФ" CAP_0603 259.575,31.525 r270 top (schematic designator C62)
C62A14 "100пФ" CAP_0603 299,29.425 r270 top (schematic designator C62)
C62A15 "100пФ" CAP_0603 339.375,29.075 r270 top (schematic designator C62)
C63A11 "100пФ" CAP_0603 16.025,6.9 r90 top (schematic designator C63)
C63A12 "100пФ" CAP_0603 77.25,9.5 r90 top (schematic designator C63)
C63A13 "100пФ" CAP_0603 242.525,10.875 r90 top (schematic designator C63)
C63A14 "100пФ" CAP_0603 283,9.925 r90 top (schematic designator C63)
C63A15 "100пФ" CAP_0603 323.375,9.375 r90 top (schematic designator C63)
C64A11 "0,1мкФ" CAP_0603 14.5,22.1 r0 bottom (schematic designator C64)
C64A12 "0,1мкФ" CAP_0603 76.9,26.55 r0 bottom (schematic designator C64)
C64A13 "0,1мкФ" CAP_0603 242.225,28.7 r0 bottom (schematic designator C64)
C64A14 "0,1мкФ" CAP_0603 283.325,26.45 r0 bottom (schematic designator C64)
C64A15 "0,1мкФ" CAP_0603 322.5,25.9 r0 bottom (schematic designator C64)
C65A11 "0,33мкФ" CAP_0805 19,2.925 r90 bottom (schematic designator C65)
C65A12 "0,33мкФ" CAP_0805 79.975,4.3 r90 bottom (schematic designator C65)
C65A13 "0,33мкФ" CAP_0805 248.3,3.05 r90 bottom (schematic designator C65)
C65A14 "0,33мкФ" CAP_0805 286.34,3.95 r90 bottom (schematic designator C65)
C65A15 "0,33мкФ" CAP_0805 326.8,4.6 r90 bottom (schematic designator C65)
C66A11 "0,1мкФ" CAP_0603 33.575,8.5 r270 top (schematic designator C66)
C66A12 "0,1мкФ" CAP_0603 94.225,10.825 r270 top (schematic designator C66)
C66A13 "0,1мкФ" CAP_0603 260.775,12.375 r270 top (schematic designator C66)
C66A14 "0,1мкФ" CAP_0603 300.4,11.35 r270 top (schematic designator C66)
C66A15 "0,1мкФ" CAP_0603 340.725,10.525 r270 top (schematic designator C66)
C67A11 "0,1мкФ" CAP_0603 14.65,25.625 r90 top (schematic designator C67)
C67A12 "0,1мкФ" CAP_0603 75.95,28.25 r90 top (schematic designator C67)
C67A13 "0,1мкФ" CAP_0603 241,30.9 r90 top (schematic designator C67)
C67A14 "0,1мкФ" CAP_0603 281.275,27.925 r90 top (schematic designator C67)
C67A15 "0,1мкФ" CAP_0603 322.025,27.45 r90 top (schematic designator C67)
C68A11 "0,1мкФ" CAP_0603 14.5,8.425 r0 bottom (schematic designator C68)
C68A12 "0,1мкФ" CAP_0603 76.975,12.075 r0 bottom (schematic designator C68)
C68A13 "0,1мкФ" CAP_0603 242.4,13.9 r0 bottom (schematic designator C68)
C68A14 "0,1мкФ" CAP_0603 283.225,12.125 r0 bottom (schematic designator C68)
C68A15 "0,1мкФ" CAP_0603 322.55,11.55 r0 bottom (schematic designator C68)
C69A11 "100пФ" CAP_0603 21.925,8.5 r270 top (schematic designator C69)
C69A12 "100пФ" CAP_0603 81.825,10.875 r270 top (schematic designator C69)
C69A13 "100пФ" CAP_0603 249.35,12.5 r270 top (schematic designator C69)
C69A14 "100пФ" CAP_0603 288.825,11.325 r270 top (schematic designator C69)
C69A15 "100пФ" CAP_0603 329.25,10.7 r270 top (schematic designator C69)
C70A11 "100пФ" CAP_0603 26.3,25.625 r90 top (schematic designator C70)
C70A12 "100пФ" CAP_0603 87.95,28.05 r90 top (schematic designator C70)
C70A13 "100пФ" CAP_0603 253.35,31.125 r90 top (schematic designator C70)
C70A14 "100пФ" CAP_0603 293.3,27.825 r90 top (schematic designator C70)
C70A15 "100пФ" CAP_0603 333.825,27.25 r90 top (schematic designator C70)
C71A11 "0,1мкФ" CAP_0603 14.05,6.675 r0 bottom (schematic designator C71)
C71A12 "0,1мкФ" CAP_0603 74.725,7.875 r0 bottom (schematic designator C71)
C71A13 "0,1мкФ" CAP_0603 243.15,7.125 r0 bottom (schematic designator C71)
C71A14 "0,1мкФ" CAP_0603 281.3,7.825 r0 bottom (schematic designator C71)
C71A15 "0,1мкФ" CAP_0603 321.625,8.575 r0 bottom (schematic designator C71)
C72A11 "0,1мкФ" CAP_0603 24.95,10.575 r0 top (schematic designator C72)
C72A12 "0,1мкФ" CAP_0603 85.3,12.625 r0 top (schematic designator C72)
C72A13 "0,1мкФ" CAP_0603 252.7,14.7 r0 top (schematic designator C72)
C72A14 "0,1мкФ" CAP_0603 292.075,13.275 r0 top (schematic designator C72)
C72A15 "0,1мкФ" CAP_0603 334.025,12.625 r180 top (schematic designator C72)
C73A11 "0,1мкФ" CAP_0603 23.275,23.55 r180 top (schematic designator C73)
C73A12 "0,1мкФ" CAP_0603 84.7,26.1 r180 top (schematic designator C73)
C73A13 "0,1мкФ" CAP_0603 249.875,29.2 r180 top (schematic designator C73)
C73A14 "0,1мкФ" CAP_0603 289.775,25.775 r180 top (schematic designator C73)
C73A15 "0,1мкФ" CAP_0603 330.6,24.925 r180 top (schematic designator C73)
C74A11 "100пФ" CAP_0603 29.575,6.9 r90 top (schematic designator C74)
C74A12 "100пФ" CAP_0603 90.05,9.2 r90 top (schematic designator C74)
C74A13 "100пФ" CAP_0603 257.475,10.975 r90 top (schematic designator C74)
C74A14 "100пФ" CAP_0603 296.75,9.9 r90 top (schematic designator C74)
C74A15 "100пФ" CAP_0603 337.05,8.875 r90 top (schematic designator C74)
C75A11 "100пФ" CAP_0603 18.641,27.225 r270 top (schematic designator C75)
C75A12 "100пФ" CAP_0603 80.025,29.875 r270 top (schematic designator C75)
C75A13 "100пФ" CAP_0603 245.2,32.55 r270 top (schematic designator C75)
C75A14 "100пФ" CAP_0603 285.2,27.95 r90 top (schematic designator C75)
C75A15 "100пФ" CAP_0603 325.85,28.875 r270 top (schematic designator C75)
C76 "1мкФ" CAP_0603 100.329,69.95 r180 top
C77 "0,1мкФ" CAP_0603 104.041,68.413 r270 top
C78 "0,1мкФ" CAP_0603 104.054,63.475 r270 top
C79 "100пФ" CAP_0603 102.1,60.357 r180 top
C80 "0,33мкФ" CAP_0805 132.225,116 r90 top
C81 "0,1мкФ" CAP_0603 129.05,115.725 r90 top
C82 "1мкФ" CAP_0603 183.8,117.175 r90 top
C83 "1мкФ" CAP_0603 168.125,116.9 r90 top
C84 "1мкФ" CAP_0603 151.511,116.65 r90 top
C85 "0,1мкФ" CAP_0603 181.475,117.2 r90 top
C86 "0,1мкФ" CAP_0603 165.15,116.75 r90 top
C87 "0,1мкФ" CAP_0603 148.536,116.55 r90 top
C88 "1мкФ" CAP_0603 89.025,56.85 r270 top
C89 "0,1мкФ" CAP_0603 88.4,62.675 r0 top
C90 "10мкФх35B" CAP_C 172.325,7.275 r90 bottom
C91 "0,1мкФ" CAP_0603 161.3,6.775 r180 top
C92 "0,1мкФ" CAP_0603 162.725,6.75 r0 top
C93 "10мкФх10B" CAP_A 167,2.325 r90 bottom
C94 "0,1мкФ" CAP_0603 160.1,18.3 r0 top
C95 "0,1мкФ" CAP_0603 39.4,150.55 r270 top
C96 "10мкФ" CAP_0603 37.275,150.575 r270 top
C97 "0,1мкФ" CAP_0603 34.35,147.7 r180 top
C98 "0,01мкФ" CAP_0603 41.725,148.9 r90 top
C99 "0,01мкФ" CAP_0603 41.25,130.35 r90 top
C100 "0,1мкФ" CAP_0603 29.95,131.925 r270 top
C101 "0,1мкФ" CAP_0603 38.925,131.75 r270 top
C102 "10мкФ" CAP_0603 31.55,131.925 r270 top
C103 "0,1мкФ" CAP_0603 214.042,38.034 r90 bottom
C104 "1нФх2кВ" CAP_1206 222.063,48.772 r90 bottom
C105 "0,1мкФ" CAP_0603 215.338,27.797 r0 top
C106 "0,1мкФ" CAP_0603 212.563,37.35 r0 top
C107 "0,1мкФ" CAP_0603 212.563,45.597 r0 top
C108 "0,1мкФ" CAP_0603 204.688,41.372 r180 bottom
C109 "8пФ" CAP_0603 207.238,47.747 r90 top
C110 "0,1мкФ" CAP_0603 199.338,44.972 r180 top
C111 "8пФ" CAP_0603 203.888,51.272 r0 top
C112 "0,1мкФ" CAP_0603 202.713,33.497 r90 bottom
C113 "0,1мкФ" CAP_0603 206.838,34.872 r180 bottom
C114 "0,1мкФ" CAP_0603 203.838,44.997 r90 bottom
C115 "0,1мкФ" CAP_0603 196.263,34.397 r270 top
C116 "0,1мкФ" CAP_0603 197.108,37.622 r0 bottom
C117 "0,1мкФ" CAP_0603 205.305,44.997 r90 bottom
C118 "0,1мкФ" CAP_0603 201.713,42.707 r270 bottom
C119 "0,1мкФ" CAP_0603 200.213,42.707 r270 bottom
C120A24 "0,1мкФ" CAP_0603 210.65,270.05 r90 top (schematic designator C120)
C120A25 "0,1мкФ" CAP_0603 210.65,290.05 r90 top (schematic designator C120)
C120A26 "0,1мкФ" CAP_0603 210.65,307.55 r90 top (schematic designator C120)
C120A27 "0,1мкФ" CAP_0603 210.65,327.55 r90 top (schematic designator C120)
C120A28 "0,1мкФ" CAP_0603 210.65,345.05 r90 top (schematic designator C120)
C121A24 "100пФ" CAP_0603 128.15,270.05 r90 top (schematic designator C121)
C121A25 "100пФ" CAP_0603 128.15,290.05 r90 top (schematic designator C121)
C121A26 "100пФ" CAP_0603 128.15,307.55 r90 top (schematic designator C121)
C121A27 "100пФ" CAP_0603 128.15,327.55 r90 top (schematic designator C121)
C121A28 "100пФ" CAP_0603 128.15,345.05 r90 top (schematic designator C121)
C122A24 "0,1мкФ" CAP_0603 198.15,270.05 r90 top (schematic designator C122)
C122A25 "0,1мкФ" CAP_0603 198.15,290.05 r90 top (schematic designator C122)
C122A26 "0,1мкФ" CAP_0603 198.15,307.55 r90 top (schematic designator C122)
C122A27 "0,1мкФ" CAP_0603 198.15,327.55 r90 top (schematic designator C122)
C122A28 "0,1мкФ" CAP_0603 198.15,345.05 r90 top (schematic designator C122)
C123A24 "100пФ" CAP_0603 80.65,270.05 r90 top (schematic designator C123)
C123A25 "100пФ" CAP_0603 80.65,290.05 r90 top (schematic designator C123)
C123A26 "100пФ" CAP_0603 80.65,307.55 r90 top (schematic designator C123)
C123A27 "100пФ" CAP_0603 80.65,327.55 r90 top (schematic designator C123)
C123A28 "100пФ" CAP_0603 80.65,345.05 r90 top (schematic designator C123)
C124A24 "0,1мкФ" CAP_0603 103.15,270.05 r90 top (schematic designator C124)
C124A25 "0,1мкФ" CAP_0603 103.15,290.05 r90 top (schematic designator C124)
C124A26 "0,1мкФ" CAP_0603 103.15,307.55 r90 top (schematic designator C124)
C124A27 "0,1мкФ" CAP_0603 103.15,327.55 r90 top (schematic designator C124)
C124A28 "0,1мкФ" CAP_0603 103.15,345.05 r90 top (schematic designator C124)
C125A24 "100пФ" CAP_0603 235.65,270.05 r90 top (schematic designator C125)
C125A25 "100пФ" CAP_0603 235.65,290.05 r90 top (schematic designator C125)
C125A26 "100пФ" CAP_0603 235.65,307.55 r90 top (schematic designator C125)
C125A27 "100пФ" CAP_0603 235.65,327.55 r90 top (schematic designator C125)
C125A28 "100пФ" CAP_0603 235.65,345.05 r90 top (schematic designator C125)
DA1 "TMR 6-2411" "TMR3 (SIP-8)" 217.075,1.95 r90 top
DA2 "TME 2405S" "TME (SIP-4)" 207.95,2.175 r90 top
DA3 "LD1117D33CTR" SOIC-8 262.05,93 r90 top
DA4 "LM2776DBVR" SOT-23-6 208.275,19.35 r0 top
DA5 "ADA4817-1ARDZ" "SOIC-8 EPAD" 59.425,85.55 r270 top
DA6 "TLV3501AIDBVR" SOT-23-6 59.8,75.15 r0 top
DA7A6 "LMC7101BIM5" SOT-23-5 168.375,173.525 r90 top (schematic designator DA7)
DA7A7 "LMC7101BIM5" SOT-23-5 168.375,191.025 r90 top (schematic designator DA7)
DA7A8 "LMC7101BIM5" SOT-23-5 168.375,206.025 r90 top (schematic designator DA7)
DA7A9 "LMC7101BIM5" SOT-23-5 168.375,223.525 r90 top (schematic designator DA7)
DA7A10 "LMC7101BIM5" SOT-23-5 167.625,237.8 r90 top (schematic designator DA7)
DA8A6 "L78L05ABUTR" SOT-89 98.375,173.525 r0 top (schematic designator DA8)
DA8A7 "L78L05ABUTR" SOT-89 98.375,188.525 r0 top (schematic designator DA8)
DA8A8 "L78L05ABUTR" SOT-89 98.375,206.025 r0 top (schematic designator DA8)
DA8A9 "L78L05ABUTR" SOT-89 98.375,221.025 r0 top (schematic designator DA8)
DA8A10 "L78L05ABUTR" SOT-89 100.175,238.2 r90 top (schematic designator DA8)
DA9A11 "SN74LVC1G3157DBV" SOT-23-6 40.025,22.625 r180 top (schematic designator DA9)
DA9A12 "SN74LVC1G3157DBV" SOT-23-6 104.4,21.275 r180 top (schematic designator DA9)
DA9A13 "SN74LVC1G3157DBV" SOT-23-6 269.45,20.25 r180 top (schematic designator DA9)
DA9A14 "SN74LVC1G3157DBV" SOT-23-6 310.05,19.2 r180 top (schematic designator DA9)
DA9A15 "SN74LVC1G3157DBV" SOT-23-6 350,18.025 r180 top (schematic designator DA9)
DA10A11 "LMC7101BIM5" SOT-23-5 44.525,22.675 r180 top (schematic designator DA10)
DA10A12 "LMC7101BIM5" SOT-23-5 108.7,21.3 r180 top (schematic designator DA10)
DA10A13 "LMC7101BIM5" SOT-23-5 273.625,20.325 r180 top (schematic designator DA10)
DA10A14 "LMC7101BIM5" SOT-23-5 314.2,19.225 r180 top (schematic designator DA10)
DA10A15 "LMC7101BIM5" SOT-23-5 354.05,18.025 r180 top (schematic designator DA10)
DA11A11 "TME 2412S" "TME (SIP-4)" 37,9.695 r270 top (schematic designator DA11)
DA11A12 "TME 2412S" "TME (SIP-4)" 98.325,11.415 r270 top (schematic designator DA11)
DA11A13 "TME 2412S" "TME (SIP-4)" 264.3,10.215 r270 top (schematic designator DA11)
DA11A14 "TME 2412S" "TME (SIP-4)" 304.09,10.74 r270 top (schematic designator DA11)
DA11A15 "TME 2412S" "TME (SIP-4)" 344.9,11.08 r270 top (schematic designator DA11)
DA12A11 "L78L05ABUTR" SOT-89 14.1,5.025 r0 bottom (schematic designator DA12)
DA12A12 "L78L05ABUTR" SOT-89 74.825,6 r0 bottom (schematic designator DA12)
DA12A13 "L78L05ABUTR" SOT-89 243.275,5.225 r0 bottom (schematic designator DA12)
DA12A14 "L78L05ABUTR" SOT-89 281.365,5.975 r0 bottom (schematic designator DA12)
DA12A15 "L78L05ABUTR" SOT-89 321.65,6.675 r0 bottom (schematic designator DA12)
DA13A11 "LMC7101BIM5" SOT-23-5 26.7,8.76 r270 top (schematic designator DA13)
DA13A12 "LMC7101BIM5" SOT-23-5 87.075,10.95 r270 top (schematic designator DA13)
DA13A13 "LMC7101BIM5" SOT-23-5 254.475,12.85 r270 top (schematic designator DA13)
DA13A14 "LMC7101BIM5" SOT-23-5 293.775,11.6 r270 top (schematic designator DA13)
DA13A15 "LMC7101BIM5" SOT-23-5 334.075,10.95 r270 top (schematic designator DA13)
DA14A11 "LMC7101BIM5" SOT-23-5 21.525,25.325 r90 top (schematic designator DA14)
DA14A12 "LMC7101BIM5" SOT-23-5 83.05,27.85 r90 top (schematic designator DA14)
DA14A13 "LMC7101BIM5" SOT-23-5 248.225,30.825 r90 top (schematic designator DA14)
DA14A14 "LMC7101BIM5" SOT-23-5 288.15,27.65 r90 top (schematic designator DA14)
DA14A15 "LMC7101BIM5" SOT-23-5 328.775,26.925 r90 top (schematic designator DA14)
DA15 "LMC7101BIM5" SOT-23-5 101.991,66.613 r180 top
DA16 "LMC7101BIM5" SOT-23-5 102.004,61.8 r180 top
DA17 "L78L12ABUTR" SOT-89 135.225,116.125 r0 top
DA18 "TME 2405S" "TME (SIP-4)" 169.15,9.99 r270 top
DA19 "TPD4S009DBVR" SOT-23-6 217.163,28.747 r180 bottom
DA20A24 "LMC7101BIM5" SOT-23-5 185.65,270.05 r90 top (schematic designator DA20)
DA20A25 "LMC7101BIM5" SOT-23-5 185.65,290.05 r90 top (schematic designator DA20)
DA20A26 "LMC7101BIM5" SOT-23-5 185.65,307.55 r90 top (schematic designator DA20)
DA20A27 "LMC7101BIM5" SOT-23-5 185.65,327.55 r90 top (schematic designator DA20)
DA20A28 "LMC7101BIM5" SOT-23-5 185.65,345.05 r90 top (schematic designator DA20)
DD1 "STM32F405ZGT6" LQFP-144 146.3,77.2 r270 top
DD2 "W25Q16JVSNIQ" SOIC-8 156.025,71.9 r0 top
DD3A6 "ADUM1100BR" SOIC-8 158.375,168.525 r90 top (schematic designator DD3)
DD3A7 "ADUM1100BR" SOIC-8 158.375,186.025 r90 top (schematic designator DD3)
DD3A8 "ADUM1100BR" SOIC-8 158.375,201.025 r90 top (schematic designator DD3)
DD3A9 "ADUM1100BR" SOIC-8 158.375,218.525 r90 top (schematic designator DD3)
DD3A10 "ADUM1100BR" SOIC-8 159,234.125 r90 top (schematic designator DD3)
DD4A6 "ADUM1200CR" SOIC-8 195.875,168.525 r90 top (schematic designator DD4)
DD4A7 "ADUM1200CR" SOIC-8 195.875,186.025 r90 top (schematic designator DD4)
DD4A8 "ADUM1200CR" SOIC-8 195.875,201.025 r90 top (schematic designator DD4)
DD4A9 "ADUM1200CR" SOIC-8 195.875,218.525 r90 top (schematic designator DD4)
DD4A10 "ADUM1200CR" SOIC-8 195.775,235.125 r90 top (schematic designator DD4)
DD5A11 "ADUM1402CRW" SOIC-16W 14.655,20 r270 bottom (schematic designator DD5)
DD5A12 "ADUM1402CRW" SOIC-16W 77.125,24.1 r270 bottom (schematic designator DD5)
DD5A13 "ADUM1402CRW" SOIC-16W 242.375,26.125 r270 bottom (schematic designator DD5)
DD5A14 "ADUM1402CRW" SOIC-16W 283.405,24.05 r270 bottom (schematic designator DD5)
DD5A15 "ADUM1402CRW" SOIC-16W 322.695,23.625 r270 bottom (schematic designator DD5)
DD6 "SN74LVC1G17DBV" SOT-23-5 188.9,118.975 r0 top
DD7 "SN74LVC1G17DBV" SOT-23-5 174.575,118.675 r0 top
DD8 "SN74LVC1G17DBV" SOT-23-5 157.4,118.425 r0 top
DD9 "SN74LVC1G17DBV" SOT-23-5 88.075,58.575 r90 top
DD10 "ADUM1100BR" SOIC-8 160.4,9.95 r90 top
DD11 "ADM2682EBRIZ" SOIC-16IC 41.85,145.125 r270 top
DD12 "W5100S-L" LQFP-48 206.163,35.272 r180 top
GB1 "DS1092-12-N8S" DS1092-12-N8S 173.05,60.925 r90 top
L1 "BLM21PG221SN1D" IND_0805 245.875,105.05 r0 top
L2 "BLM21PG221SN1D" IND_0805 245.825,99.225 r0 top
L3 "BLM21PG221SN1D" IND_0805 245.775,93.975 r0 top
L4 "BLM21PG221SN1D" IND_0805 245.825,88.625 r0 top
L5 "BLM21PG221SN1D" IND_0805 206.263,41.072 r270 bottom
L6 "BLM21PG221SN1D" IND_0805 205.063,36.772 r0 bottom
L7 "BLM21PG221SN1D" IND_0805 199.363,45.172 r0 bottom
R1 "0" RES_0805 245.875,103.1 r0 top
R2 "0" RES_0805 245.875,97.325 r0 top
R3 "0" RES_0805 245.775,92 r0 top
R4 "0" RES_0805 245.825,86.675 r0 top
R5 "10к" RES_0603 129.1,70.75 r270 bottom
R6 "200" RES_0603 127.45,46.675 r0 top
R7 "200" RES_0603 127.5,48.625 r0 top
R8 "200" RES_0603 127.45,50.75 r0 top
R9 "10к" RES_0603 150.375,71.4 r90 top
R10 "0" RES_0603 127.325,84.025 r0 top
R11 "1М" 3224W 62.225,90.15 r180 top
R12 "0" RES_0603 51.361,81.7 r90 top
R13 "NA" RES_0603 51.375,84.725 r90 top
R14 "5,1к" RES_0603 56.525,77.075 r270 top
R15 "10к" RES_0603 54.825,75.525 r90 top
R16 "10к" RES_0603 56.55,74.075 r270 top
R17 "10к" RES_0603 58.05,75.525 r90 top
R18 "10к" 3224W 61.125,67.225 r0 top
R19A2 "10к" RES_0603 308.5,84.875 r90 top (schematic designator R19)
R19A3 "10к" RES_0603 308.3,88.925 r90 top (schematic designator R19)
R19A4 "10к" RES_0603 308.35,93.725 r90 top (schematic designator R19)
R19A5 "10к" RES_0603 308.75,99.175 r90 top (schematic designator R19)
R20A2 "10к" RES_0603 305.925,84.9 r90 top (schematic designator R20)
R20A3 "10к" RES_0603 305.975,89 r90 top (schematic designator R20)
R20A4 "10к" RES_0603 305.9,93.75 r90 top (schematic designator R20)
R20A5 "10к" RES_0603 305.925,99.025 r90 top (schematic designator R20)
R21A6 "200" RES_0603 225.875,173.525 r90 top (schematic designator R21)
R21A7 "200" RES_0603 225.875,191.025 r90 top (schematic designator R21)
R21A8 "200" RES_0603 225.875,206.025 r90 top (schematic designator R21)
R21A9 "200" RES_0603 225.875,223.525 r90 top (schematic designator R21)
R21A10 "200" RES_0603 224.8,238.05 r90 top (schematic designator R21)
R22A6 "10к" RES_0603 148.375,173.525 r90 top (schematic designator R22)
R22A7 "10к" RES_0603 148.375,191.025 r90 top (schematic designator R22)
R22A8 "10к" RES_0603 148.375,206.025 r90 top (schematic designator R22)
R22A9 "10к" RES_0603 148.375,223.525 r90 top (schematic designator R22)
R22A10 "10к" RES_0603 147.925,238.2 r90 top (schematic designator R22)
R23A6 "10к" RES_0603 205.875,173.525 r90 top (schematic designator R23)
R23A7 "10к" RES_0603 205.875,191.025 r90 top (schematic designator R23)
R23A8 "10к" RES_0603 205.875,206.025 r90 top (schematic designator R23)
R23A9 "10к" RES_0603 205.875,223.525 r90 top (schematic designator R23)
R23A10 "10к" RES_0603 204.925,237.625 r90 top (schematic designator R23)
R24A6 "10к" RES_0603 215.875,173.525 r90 top (schematic designator R24)
R24A7 "10к" RES_0603 215.875,191.025 r90 top (schematic designator R24)
R24A8 "10к" RES_0603 215.875,206.025 r90 top (schematic designator R24)
R24A9 "10к" RES_0603 215.875,223.525 r90 top (schematic designator R24)
R24A10 "10к" RES_0603 216.025,237.575 r90 top (schematic designator R24)
R25A11 "10к" RES_0603 46.2,26.6 r180 top (schematic designator R25)
R25A12 "10к" RES_0603 109.8,25.35 r180 top (schematic designator R25)
R25A13 "10к" RES_0603 275.1,24.15 r180 top (schematic designator R25)
R25A14 "10к" RES_0603 315.9,23.125 r180 top (schematic designator R25)
R25A15 "10к" RES_0603 356.475,22.25 r180 top (schematic designator R25)
R26A11 "6,49к" RES_0603 29.325,25.625 r90 top (schematic designator R26)
R26A12 "6,49к" RES_0603 90.175,28.075 r90 top (schematic designator R26)
R26A13 "6,49к" RES_0603 256.625,29.9 r90 top (schematic designator R26)
R26A14 "6,49к" RES_0603 296.025,27.775 r90 top (schematic designator R26)
R26A15 "6,49к" RES_0603 336.425,27.5 r90 top (schematic designator R26)
R27A11 "15к" RES_0603 18.925,8.5 r270 top (schematic designator R27)
R27A12 "15к" RES_0603 80.225,11.1 r270 top (schematic designator R27)
R27A13 "15к" RES_0603 245.4,12.525 r270 top (schematic designator R27)
R27A14 "15к" RES_0603 286.025,11.575 r270 top (schematic designator R27)
R27A15 "15к" RES_0603 326.325,10.95 r270 top (schematic designator R27)
R28A11 "10к" RES_0603 30.775,25.625 r90 top (schematic designator R28)
R28A12 "10к" RES_0603 91.625,28.05 r90 top (schematic designator R28)
R28A13 "10к" RES_0603 258.075,29.925 r90 top (schematic designator R28)
R28A14 "10к" RES_0603 297.525,27.8 r90 top (schematic designator R28)
R28A15 "10к" RES_0603 337.875,27.525 r90 top (schematic designator R28)
R29A11 "10к" RES_0603 17.475,8.5 r270 top (schematic designator R29)
R29A12 "10к" RES_0603 78.75,11.075 r270 top (schematic designator R29)
R29A13 "10к" RES_0603 243.925,12.525 r270 top (schematic designator R29)
R29A14 "10к" RES_0603 284.5,11.55 r270 top (schematic designator R29)
R29A15 "10к" RES_0603 324.85,10.95 r270 top (schematic designator R29)
R30A11 "10к" RES_0603 23.45,10.575 r180 top (schematic designator R30)
R30A12 "10к" RES_0603 83.425,12.625 r180 top (schematic designator R30)
R30A13 "10к" RES_0603 251.025,14.75 r180 top (schematic designator R30)
R30A14 "10к" RES_0603 290.4,13.225 r180 top (schematic designator R30)
R30A15 "10к" RES_0603 330.775,12.6 r180 top (schematic designator R30)
R31A11 "10к" RES_0603 24.775,23.55 r0 top (schematic designator R31)
R31A12 "10к" RES_0603 86.45,26.1 r0 top (schematic designator R31)
R31A13 "10к" RES_0603 251.575,29.175 r0 top (schematic designator R31)
R31A14 "10к" RES_0603 291.625,25.8 r0 top (schematic designator R31)
R31A15 "10к" RES_0603 332.2,24.9 r0 top (schematic designator R31)
R32A11 "10к" RES_0603 31.025,8.5 r270 top (schematic designator R32)
R32A12 "10к" RES_0603 91.525,10.8 r270 top (schematic designator R32)
R32A13 "10к" RES_0603 258.95,12.55 r270 top (schematic designator R32)
R32A14 "10к" RES_0603 298.225,11.5 r270 top (schematic designator R32)
R32A15 "10к" RES_0603 338.5,10.475 r270 top (schematic designator R32)
R33A11 "10к" RES_0603 17.191,25.625 r90 top (schematic designator R33)
R33A12 "10к" RES_0603 78.575,28.25 r90 top (schematic designator R33)
R33A13 "10к" RES_0603 243.7,30.95 r90 top (schematic designator R33)
R33A14 "10к" RES_0603 283.725,27.95 r90 top (schematic designator R33)
R33A15 "10к" RES_0603 324.4,27.275 r90 top (schematic designator R33)
R34A11 "24,9к" RES_0603 23.375,6.9 r90 top (schematic designator R34)
R34A12 "24,9к" RES_0603 83.3,9.275 r90 top (schematic designator R34)
R34A13 "24,9к" RES_0603 250.95,10.85 r90 top (schematic designator R34)
R34A14 "24,9к" RES_0603 290.325,9.725 r90 top (schematic designator R34)
R34A15 "24,9к" RES_0603 330.725,9.1 r90 top (schematic designator R34)
R35A11 "16,5к" RES_0603 24.85,25.625 r90 top (schematic designator R35)
R35A12 "16,5к" RES_0603 86.475,28.15 r90 top (schematic designator R35)
R35A13 "16,5к" RES_0603 251.825,31.125 r90 top (schematic designator R35)
R35A14 "16,5к" RES_0603 291.8,27.725 r90 top (schematic designator R35)
R35A15 "16,5к" RES_0603 332.275,27.275 r90 top (schematic designator R35)
R36A11 "10к" RES_0603 23.375,13.275 r90 top (schematic designator R36)
R36A12 "10к" RES_0603 84.5,15.375 r90 top (schematic designator R36)
R36A13 "10к" RES_0603 251.275,17.4 r90 top (schematic designator R36)
R36A14 "10к" RES_0603 289.1,15.725 r90 top (schematic designator R36)
R36A15 "10к" RES_0603 329.675,15.5 r90 top (schematic designator R36)
R37A11 "10к" RES_0603 21.925,13.275 r90 top (schematic designator R37)
R37A12 "10к" RES_0603 86.25,15.275 r90 top (schematic designator R37)
R37A13 "10к" RES_0603 252.775,17.35 r90 top (schematic designator R37)
R37A14 "10к" RES_0603 290.65,15.725 r90 top (schematic designator R37)
R37A15 "10к" RES_0603 331.15,15.5 r90 top (schematic designator R37)
R38A11 "24,9к" RES_0603 28.125,6.9 r90 top (schematic designator R38)
R38A12 "24,9к" RES_0603 88.575,9.2 r90 top (schematic designator R38)
R38A13 "24,9к" RES_0603 256,10.925 r90 top (schematic designator R38)
R38A14 "24,9к" RES_0603 295.275,9.9 r90 top (schematic designator R38)
R38A15 "24,9к" RES_0603 335.575,8.875 r90 top (schematic designator R38)
R39A11 "16,5к" RES_0603 20.091,25.625 r90 top (schematic designator R39)
R39A12 "16,5к" RES_0603 81.5,28.3 r90 top (schematic designator R39)
R39A13 "16,5к" RES_0603 246.725,30.95 r90 top (schematic designator R39)
R39A14 "16,5к" RES_0603 286.675,29.525 r270 top (schematic designator R39)
R39A15 "16,5к" RES_0603 327.3,27.275 r90 top (schematic designator R39)
R40 "10к" RES_0603 103.229,69.95 r180 top
R41 "12к" RES_0603 103.229,65.15 r180 top
R42 "10к" RES_0603 100.329,65.15 r180 top
R43 "200" RES_0603 104.054,60.382 r270 top
R44 "10к" RES_0603 98.675,60.382 r270 top
R45 "10к" RES_0603 104.054,55.332 r90 top
R46 "10" RES_1210 95.875,56.357 r0 top
R47 "200" RES_0603 216.7,75.3 r180 top
R48 "200" RES_0603 216.65,79.325 r180 top
R49 "200" RES_0603 216.65,83.45 r180 top
R50 "200" RES_0603 214.475,90.1 r180 top
R51 "200" RES_0603 214.55,94.875 r180 top
R52 "200" RES_0603 214.25,100.275 r180 top
R53 "1к" RES_0603 186.325,117.325 r90 top
R54 "1к" RES_0603 171.1,116.95 r90 top
R55 "1к" RES_0603 154.6,116.5 r90 top
R56 "10к" RES_0603 193.05,117.5 r90 top
R57 "10к" RES_0603 179.35,117.15 r90 top
R58 "10к" RES_0603 162.175,116.65 r90 top
R59 "200" RES_0603 145.8,116.45 r90 top
R60 "1к" RES_0603 86.525,55.25 r90 top
R61 "10к" RES_0603 86.525,58.8 r90 top
R62 "10к" RES_0603 157.525,8.9 r270 top
R63 "120" RES_0603 34.5,129.9 r0 top
R64 "49,9" RES_0603 214.163,31.35 r180 top
R65 "49,9" RES_0603 214.163,35.85 r180 top
R66 "49,9" RES_0603 214.163,39.597 r180 top
R67 "49,9" RES_0603 214.163,44.097 r180 top
R68 "3,3" RES_0603 212.563,32.849 r0 top
R69 "3,3" RES_0603 212.563,41.097 r0 top
R70 "1к" RES_0603 214.163,49.284 r180 top
R71 "3,3" RES_0603 212.563,34.35 r0 top
R72 "3,3" RES_0603 212.563,42.597 r0 top
R73 "1к" RES_0603 214.163,47.784 r180 top
R74 "300" RES_0603 208.813,49.284 r0 top
R75 "1М" RES_0603 205.463,45.472 r180 top
R76 "12к" RES_0603 210.413,47.784 r180 top
R77 "0" RES_0603 202.163,47.747 r90 top
R78 "10к" RES_0603 204.863,31.322 r0 top
R79A24 "15к" RES_0603 153.15,270.05 r90 top (schematic designator R79)
R79A25 "15к" RES_0603 153.15,290.05 r90 top (schematic designator R79)
R79A26 "15к" RES_0603 153.15,307.55 r90 top (schematic designator R79)
R79A27 "15к" RES_0603 153.15,327.55 r90 top (schematic designator R79)
R79A28 "15к" RES_0603 153.15,345.05 r90 top (schematic designator R79)
R80A24 "10к" RES_0603 115.65,270.05 r90 top (schematic designator R80)
R80A25 "10к" RES_0603 115.65,290.05 r90 top (schematic designator R80)
R80A26 "10к" RES_0603 115.65,307.55 r90 top (schematic designator R80)
R80A27 "10к" RES_0603 115.65,327.55 r90 top (schematic designator R80)
R80A28 "10к" RES_0603 115.65,345.05 r90 top (schematic designator R80)
R81A24 "10к" RES_0603 140.65,270.05 r90 top (schematic designator R81)
R81A25 "10к" RES_0603 140.65,290.05 r90 top (schematic designator R81)
R81A26 "10к" RES_0603 140.65,307.55 r90 top (schematic designator R81)
R81A27 "10к" RES_0603 140.65,327.55 r90 top (schematic designator R81)
R81A28 "10к" RES_0603 140.65,345.05 r90 top (schematic designator R81)
R82A24 "10к" RES_0603 163.15,270.05 r90 top (schematic designator R82)
R82A25 "10к" RES_0603 163.15,290.05 r90 top (schematic designator R82)
R82A26 "10к" RES_0603 163.15,307.55 r90 top (schematic designator R82)
R82A27 "10к" RES_0603 163.15,327.55 r90 top (schematic designator R82)
R82A28 "10к" RES_0603 163.15,345.05 r90 top (schematic designator R82)
R83A24 "16,5к" RES_0603 93.15,270.05 r90 top (schematic designator R83)
R83A25 "16,5к" RES_0603 93.15,290.05 r90 top (schematic designator R83)
R83A26 "16,5к" RES_0603 93.15,307.55 r90 top (schematic designator R83)
R83A27 "16,5к" RES_0603 93.15,327.55 r90 top (schematic designator R83)
R83A28 "16,5к" RES_0603 93.15,345.05 r90 top (schematic designator R83)
R84A24 "16,5к" RES_0603 223.15,270.05 r90 top (schematic designator R84)
R84A25 "16,5к" RES_0603 223.15,290.05 r90 top (schematic designator R84)
R84A26 "16,5к" RES_0603 223.15,307.55 r90 top (schematic designator R84)
R84A27 "16,5к" RES_0603 223.15,327.55 r90 top (schematic designator R84)
R84A28 "16,5к" RES_0603 223.15,345.05 r90 top (schematic designator R84)
U1A6 "TLP291(GB-TP,SE" 11-3C1 235.875,168.525 r90 top (schematic designator U1)
U1A7 "TLP291(GB-TP,SE" 11-3C1 235.875,186.025 r90 top (schematic designator U1)
U1A8 "TLP291(GB-TP,SE" 11-3C1 235.875,201.025 r90 top (schematic designator U1)
U1A9 "TLP291(GB-TP,SE" 11-3C1 235.875,218.525 r90 top (schematic designator U1)
U1A10 "TLP291(GB-TP,SE" 11-3C1 235.275,234.075 r90 top (schematic designator U1)
U2A11 "ACPL-C87A-500E" SSO-8 33.575,21.675 r270 top (schematic designator U2)
U2A12 "ACPL-C87A-500E" SSO-8 94.25,24.625 r270 top (schematic designator U2)
U2A13 "ACPL-C87A-500E" SSO-8 261.025,26.95 r270 top (schematic designator U2)
U2A14 "ACPL-C87A-500E" SSO-8 300.325,24.875 r270 top (schematic designator U2)
U2A15 "ACPL-C87A-500E" SSO-8 340.725,23.9 r270 top (schematic designator U2)
U3A11 "ACPL-C87A-500E" SSO-8 14.65,10.925 r90 top (schematic designator U3)
U3A12 "ACPL-C87A-500E" SSO-8 76.025,14.025 r90 top (schematic designator U3)
U3A13 "ACPL-C87A-500E" SSO-8 241.05,15.975 r90 top (schematic designator U3)
U3A14 "ACPL-C87A-500E" SSO-8 281.35,14.075 r90 top (schematic designator U3)
U3A15 "ACPL-C87A-500E" SSO-8 322,13.475 r90 top (schematic designator U3)
U4 "TLP291(GB-TP,SE" 11-3C1 218.6,75.325 r0 top
U5 "TLP291(GB-TP,SE" 11-3C1 218.575,79.35 r0 top
U6 "TLP291(GB-TP,SE" 11-3C1 218.575,83.425 r0 top
U7 "TLP127" 11-4C1 216.825,90.175 r0 top
U8 "TLP127" 11-4C1 216.85,94.725 r0 top
U9 "TLP127" 11-4C1 216.85,100.1 r0 top
U10 "TLP291(GB-TP,SE" 11-3C1 141.6,111.975 r90 top
U11A24 "ACPL-C87A-500E" SSO-8 175.65,262.55 r90 top (schematic designator U11)
U11A25 "ACPL-C87A-500E" SSO-8 175.65,280.05 r90 top (schematic designator U11)
U11A26 "ACPL-C87A-500E" SSO-8 175.65,300.05 r90 top (schematic designator U11)
U11A27 "ACPL-C87A-500E" SSO-8 175.65,317.55 r90 top (schematic designator U11)
U11A28 "ACPL-C87A-500E" SSO-8 175.65,337.55 r90 top (schematic designator U11)
VD1 "KP-2012MGC" LED_0805 130.825,46.675 r0 top
VD2 "KP-2012SYC" LED_0805 130.875,48.65 r0 top
VD3 "KP-2012EC" LED_0805 130.825,50.7 r0 top
VT1 "AO3400A" SOT-23-3 102.55,56.982 r270 top
XP1 "B2B-EH-A" B2B-EH-A 54.65,95.5 r180 top
XP2 "B8B-PHDSS" B8B-PHDSS 317.05,96.85 r90 top
XP3 "B10B-PHDSS" B10B-PHDSS 250.825,302.575 r270 top
XP4 "B2P-VH" B2P-VH 225.575,15.125 r0 top
XP5 "PLD-6" PLD-6 150.885,49.7 r0 top
XP6A6 "B8B-PHDSS" B8B-PHDSS 255.875,173.525 r90 top (schematic designator XP6)
XP6A7 "B8B-PHDSS" B8B-PHDSS 255.875,191.025 r90 top (schematic designator XP6)
XP6A8 "B8B-PHDSS" B8B-PHDSS 255.875,206.025 r90 top (schematic designator XP6)
XP6A9 "B8B-PHDSS" B8B-PHDSS 255.875,223.525 r90 top (schematic designator XP6)
XP6A10 "B8B-PHDSS" B8B-PHDSS 256.175,240.325 r90 top (schematic designator XP6)
XP7A11 "B8B-PHDSS" B8B-PHDSS 21.125,3.625 r180 top (schematic designator XP7)
XP7A12 "B8B-PHDSS" B8B-PHDSS 82.125,4.275 r180 top (schematic designator XP7)
XP7A13 "B8B-PHDSS" B8B-PHDSS 250.475,3.8 r180 top (schematic designator XP7)
XP7A14 "B8B-PHDSS" B8B-PHDSS 288.79,4.525 r180 top (schematic designator XP7)
XP7A15 "B8B-PHDSS" B8B-PHDSS 329,5.175 r180 top (schematic designator XP7)
XP8 "B2B-EH-A" B2B-EH-A 99.1,51.9 r0 top
XP9 "B8B-PHDSS" B8B-PHDSS 229.15,76.125 r270 top
XP10 "B8B-PHDSS" B8B-PHDSS 228.575,91.675 r270 top
XP11 "B8B-PHDSS" B8B-PHDSS 229.4,60.325 r270 top
XP12 "B2B-EH-A" B2B-EH-A 86.525,52.075 r0 top
XP13 "B3B-EH-A" B3B-EH-A 159.05,2.475 r0 top
XP14 "B3B-EH-A" B3B-EH-A 34.525,125.95 r0 top
XS1 "LPJD0012BENL" LPJD0012BENL 219.603,32.979 r90 top
ZQ1 "16МГц" NX2520SA 133.15,82.55 r0 top
ZQ2 "32,768кГц" NX3215SA 140.275,80.875 r90 top
ZQ3 "25МГц" 7M 205.563,47.272 r90 top

## Footprints (in the part's own frame and the unit in brackets; to place one, negate y for a bottom-side part, rotate by r counter-clockwise, add the part's x,y. Pads: shape width x height; smd on the part's side, far side on the other; paste and mask are expansions set on the pad)
7M [mm]
  rect 1.4x1.2 smd: 1(0,0) 2(2.2,0.025) 3(2.2,1.725) 4(0,1.725)
  silkscreen extent -0.92,-0.82 3.13,2.55, body extent -0.55,-0.45 2.75,2.15, height 0.8
11-3C1 [mm]
  rect 1.5x0.8 smd: 1(0,0) 2(0,-1.275) 3(6.4,-1.275) 4(6.4,-0.025)
  silkscreen extent -0.12,-1.95 5.25,1, body extent -0.28,-1.95 6.73,0.65, height 2.2
11-4C1 [mm]
  rect 1.5x0.8 smd: 1(0,0) 3(0,-2.55) 4(6.4,-2.55) 6(6.4,-0.025)
  silkscreen extent -0.12,-3.17 5.25,1, body extent -0.15,-3.07 6.65,0.52, height 2.55
3224W [mm]
  rect 2.2x1.3 smd: 1(0,0) 3(0,2.525)
  rect 2.2x2 smd: 2(-3.45,1.3)
  silkscreen extent -3.72,-1.12 0.25,3.72, body extent -3.72,-1.12 0.23,3.71, height 5.29
B2B-EH-A [mm]
  rect 1.8x1.8 hole 0.965: 1(0,0)
  round 1.8 hole 1: 2(2.5,0)
  silkscreen extent -2.45,-2.2 5.05,2.6, body extent -2.45,-2.2 5.05,1.6, height 6
B2P-VH [mm]
  rect 2.8x2.8 hole 1.8: 1(0,0)
  round 2.8 hole 1.8: 2(3.96,0)
  silkscreen extent -1.92,-4.75 5.92,6.5, body extent -1.93,-4.75 5.93,3.75, height 10.9
B3B-EH-A [mm]
  rect 1.8x1.8 hole 0.965: 1(0,0)
  round 1.8 hole 1: 2(2.5,0) 3(5,0)
  silkscreen extent -2.5,-2.25 7.5,2.5, body extent -2.5,-2.25 7.5,1.55, height 6
B8B-PHDSS [mm]
  rect 1.2x1.2 hole 0.8: 1(0,0)
  round 1.2 hole 0.8: 2(0,2) 3(-2,0) 4(-2,2) 5(-4,0) 6(-4,2) 7(-6,0) 8(-6,2)
  silkscreen extent -7.93,-2.47 1.97,3.52, body extent -7.93,-1.48 1.97,3.52, height 6.5
B10B-PHDSS [mm]
  rect 1.2x1.2 hole 0.8: 1(0,0)
  round 1.2 hole 0.8: 2(0,2) 3(-2,0) 4(-2,2) 5(-4,0) 6(-4,2) 7(-6,0) 8(-6,2) 9(-8,0) 10(-8,2)
  silkscreen extent -9.92,-2.47 1.95,3.5, body extent -9.95,-1.5 1.95,3.5, height 6.5
CAP_0603 [mm]
  rect 0.85x0.95 smd: 1(0.025,0) 2(1.575,0)
  silkscreen extent -0.58,-0.65 2.17,0.65, body extent 0.02,-0.43 1.63,0.44, height 0.8
CAP_0805 [mm]
  rect 1.27x1.27 smd: 1(0,0) 2(2,0)
  silkscreen extent -0.85,-0.85 2.85,0.85, body extent 0,-0.63 2,0.62, height 1
CAP_1206 [mm]
  rect 1.6x1.8 smd: 1(0,0) 2(2.8,0)
  silkscreen extent -1.02,-1.12 3.83,1.12, body extent -0.25,-0.77 2.95,0.83, height 0.94
CAP_A [mm]
  rect 2x1.2 smd: 1(0,0) 2(2.8,0)
  silkscreen extent -2.15,-0.82 4.03,0.82, body extent -0.33,-0.8 3.13,0.8, height 1.65